# Altium PCB Temp_sense_Project 2.0(right angle.PcbDoc (part 1 of 5)
Units mm, origin at the board's own origin, x right, y up, seen from the top; angles counter-clockwise.
Board outline 238.12 x 109.47 mm, 4 copper layers (Top Layer, Layer 1, Layer 2, Bottom Layer), stack 0.603 mm thick; 185 components, 161 nets, 944 pads, 283 vias.
Unrouted connection lines stored in the file: 2.
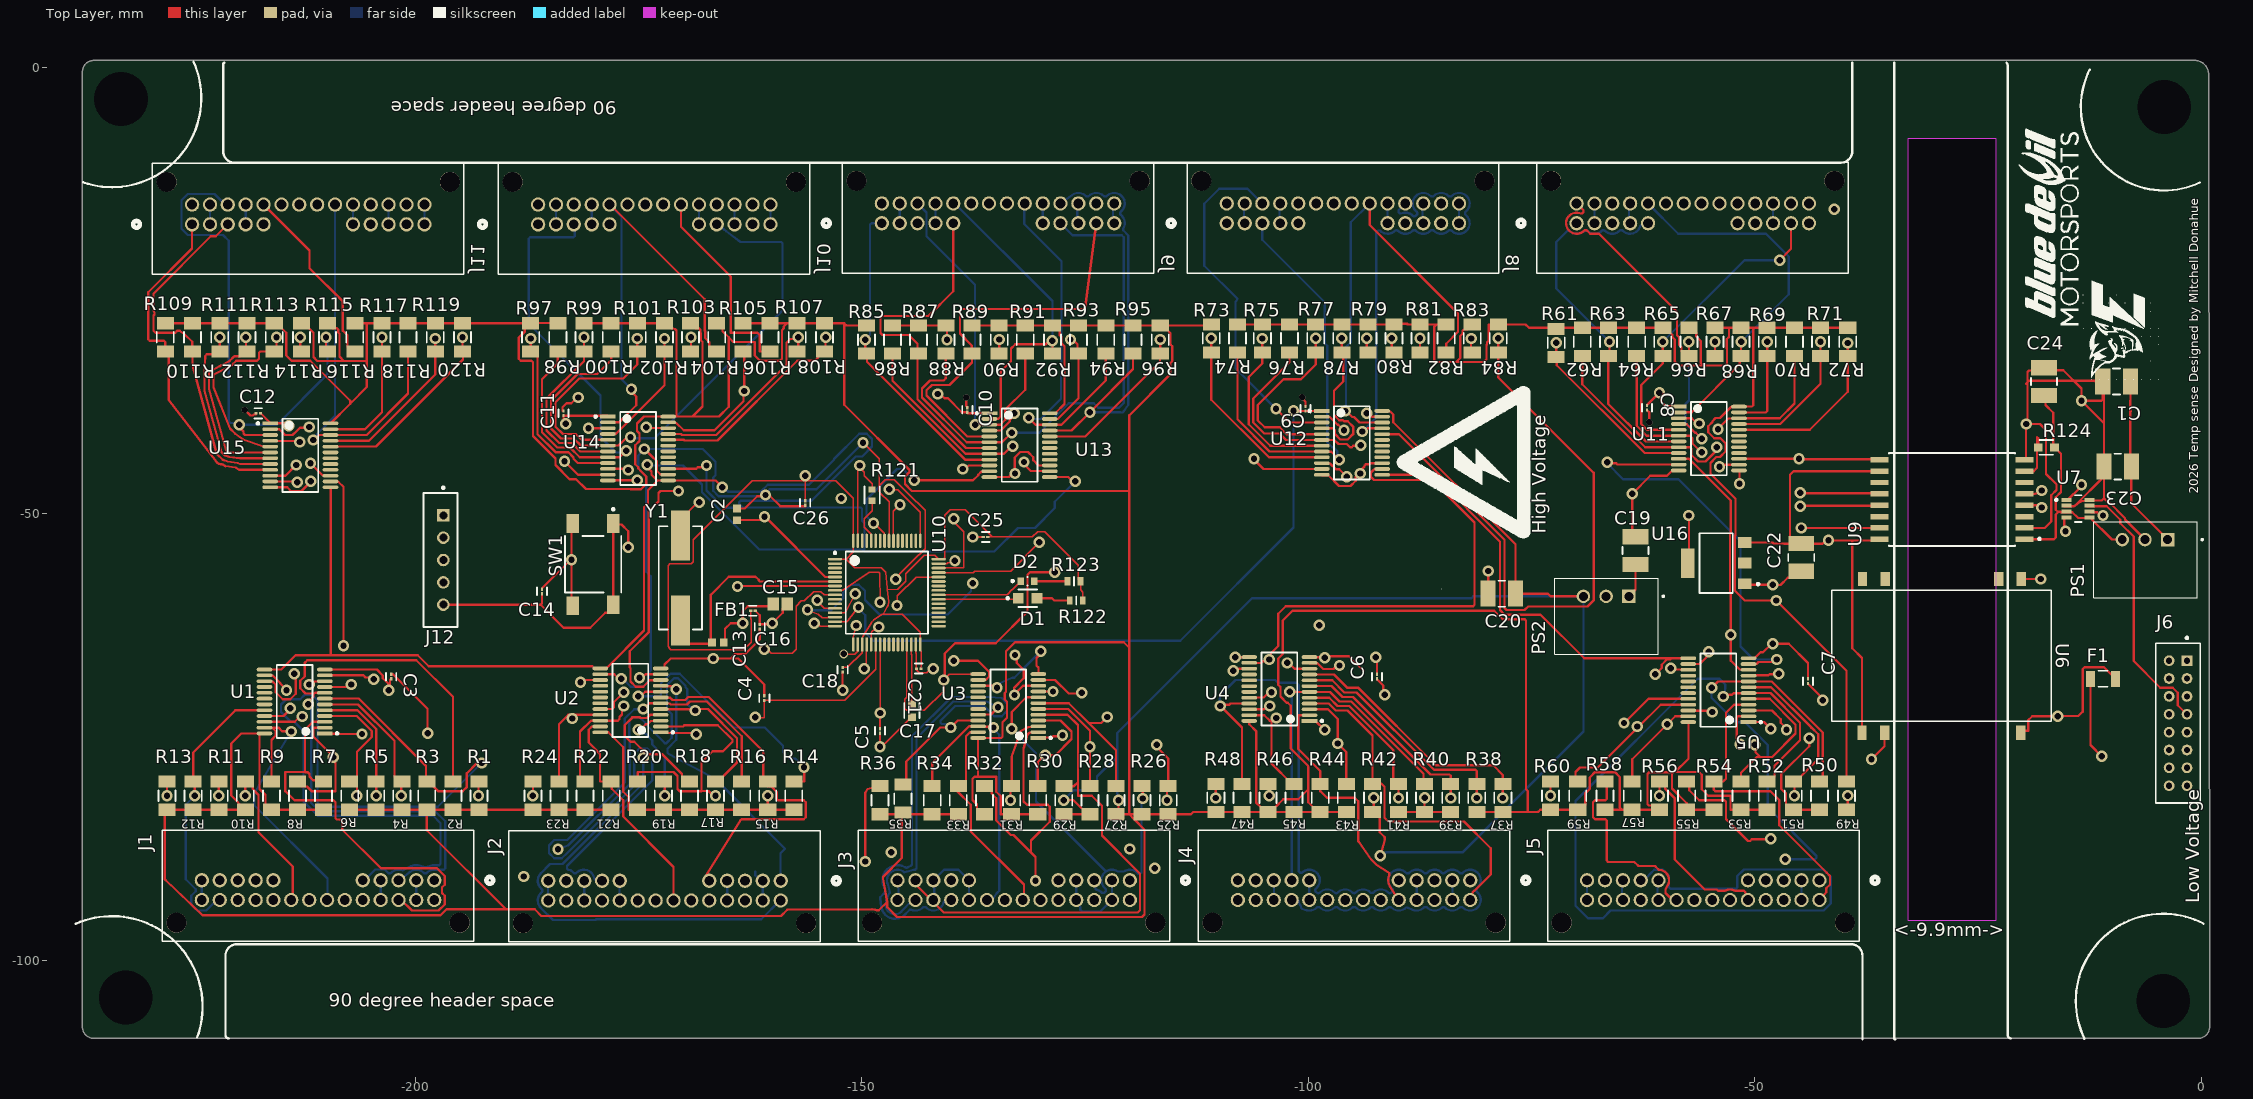
[diagram p0: Top Layer view]
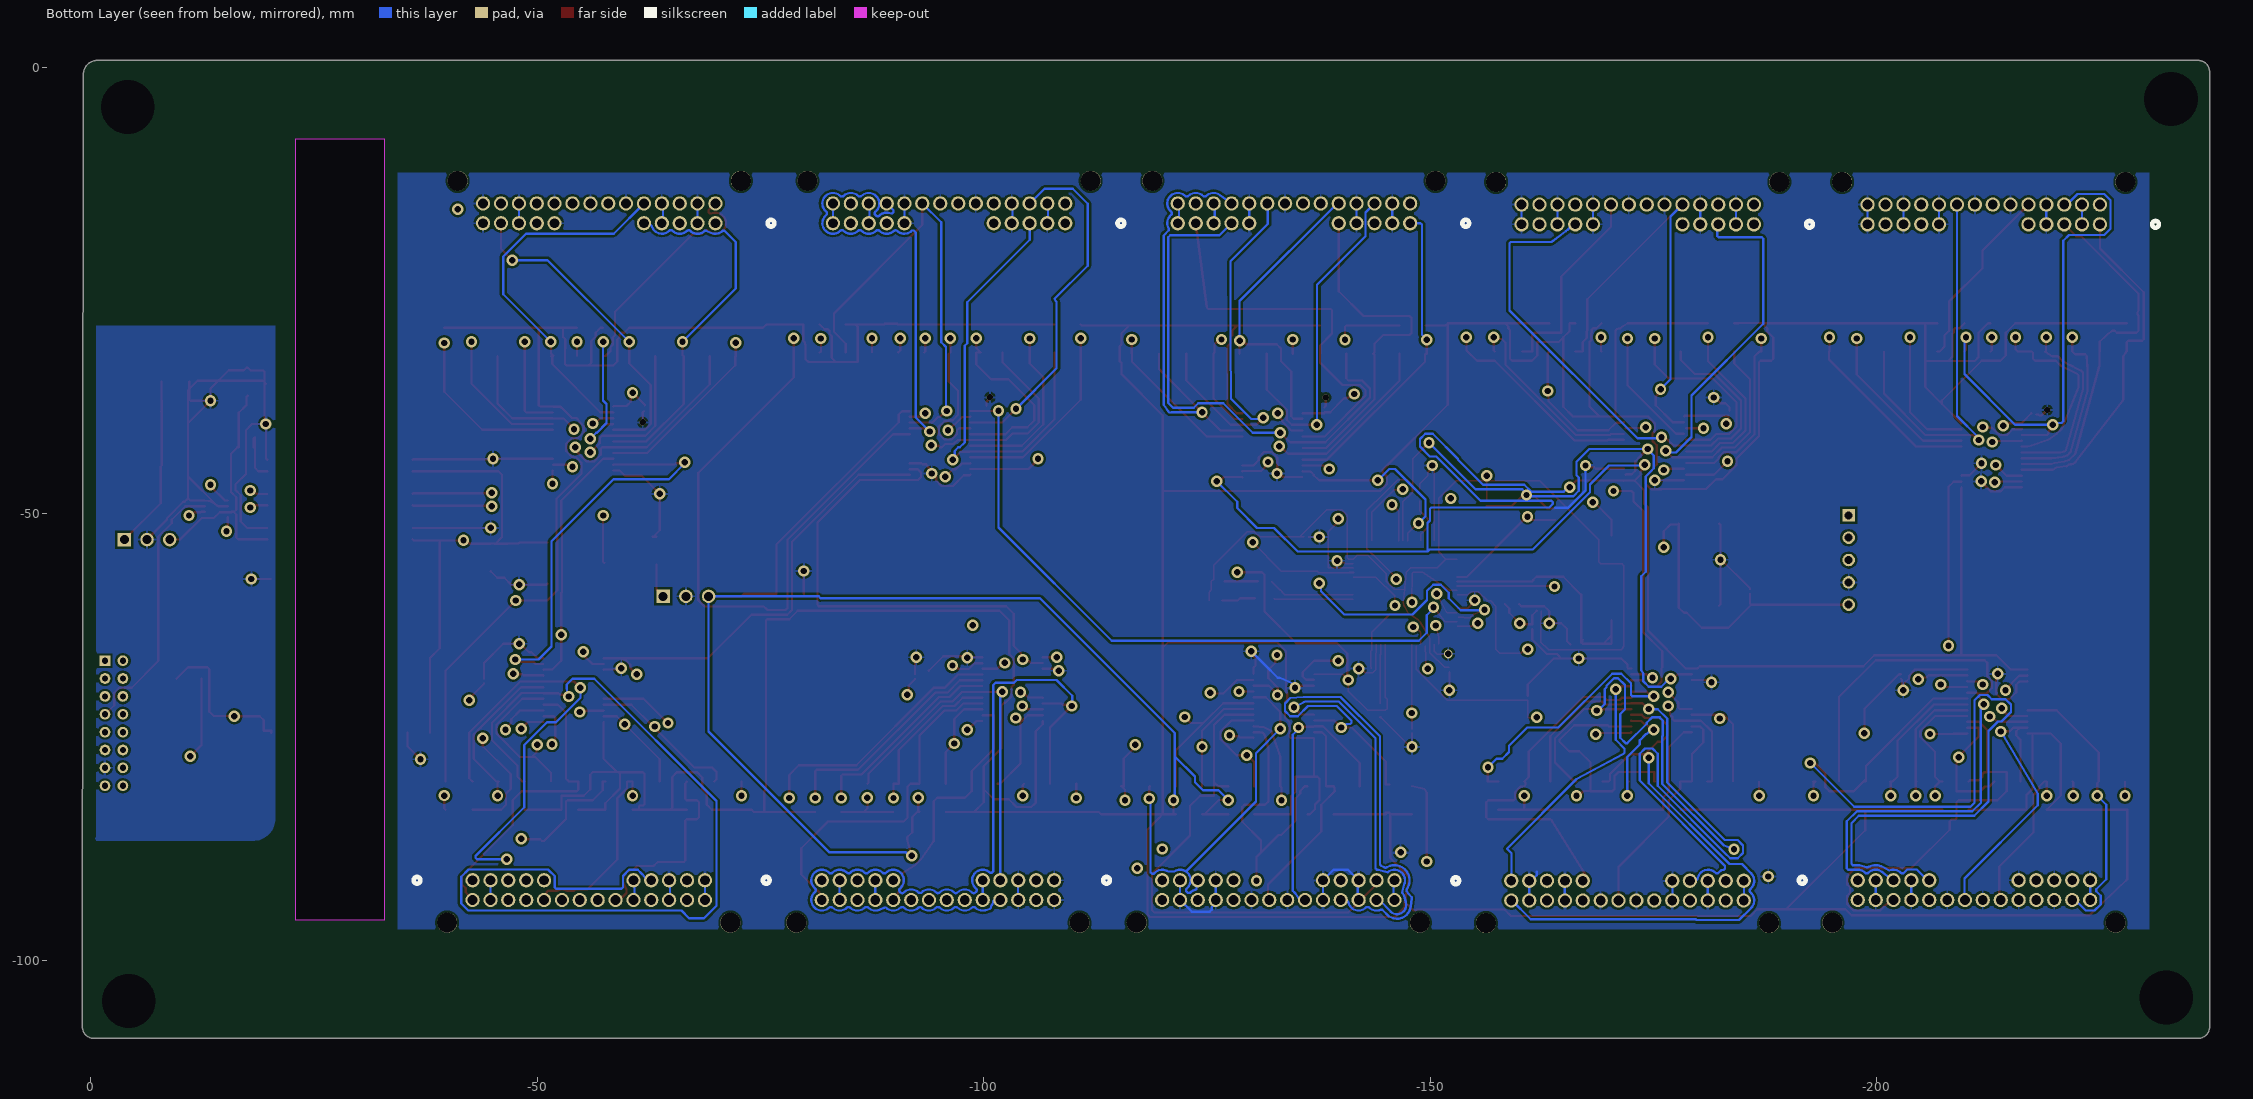
[diagram p1: Bottom Layer view, seen from below]
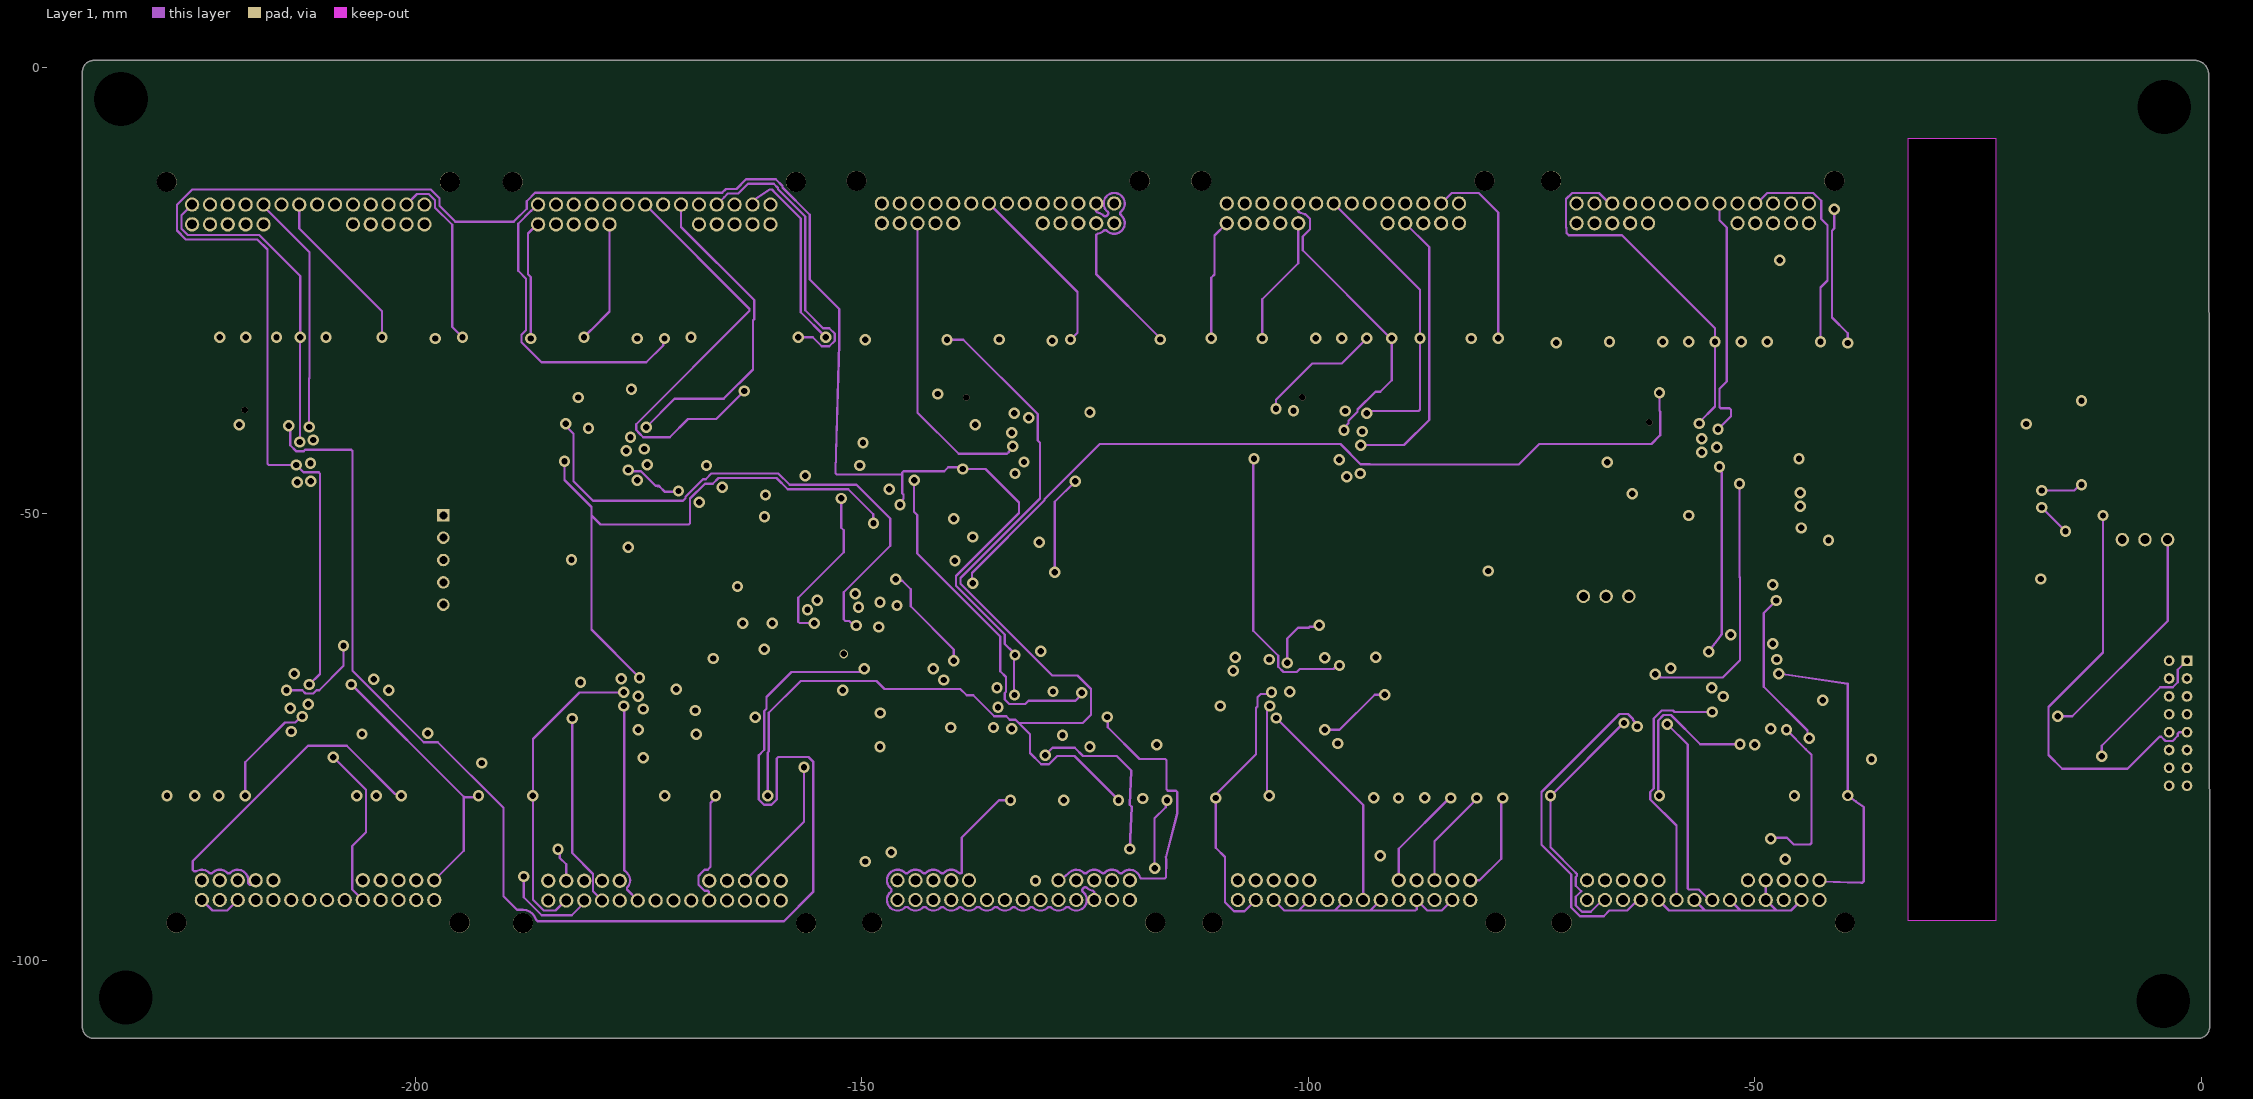
[diagram p2: Layer 1]
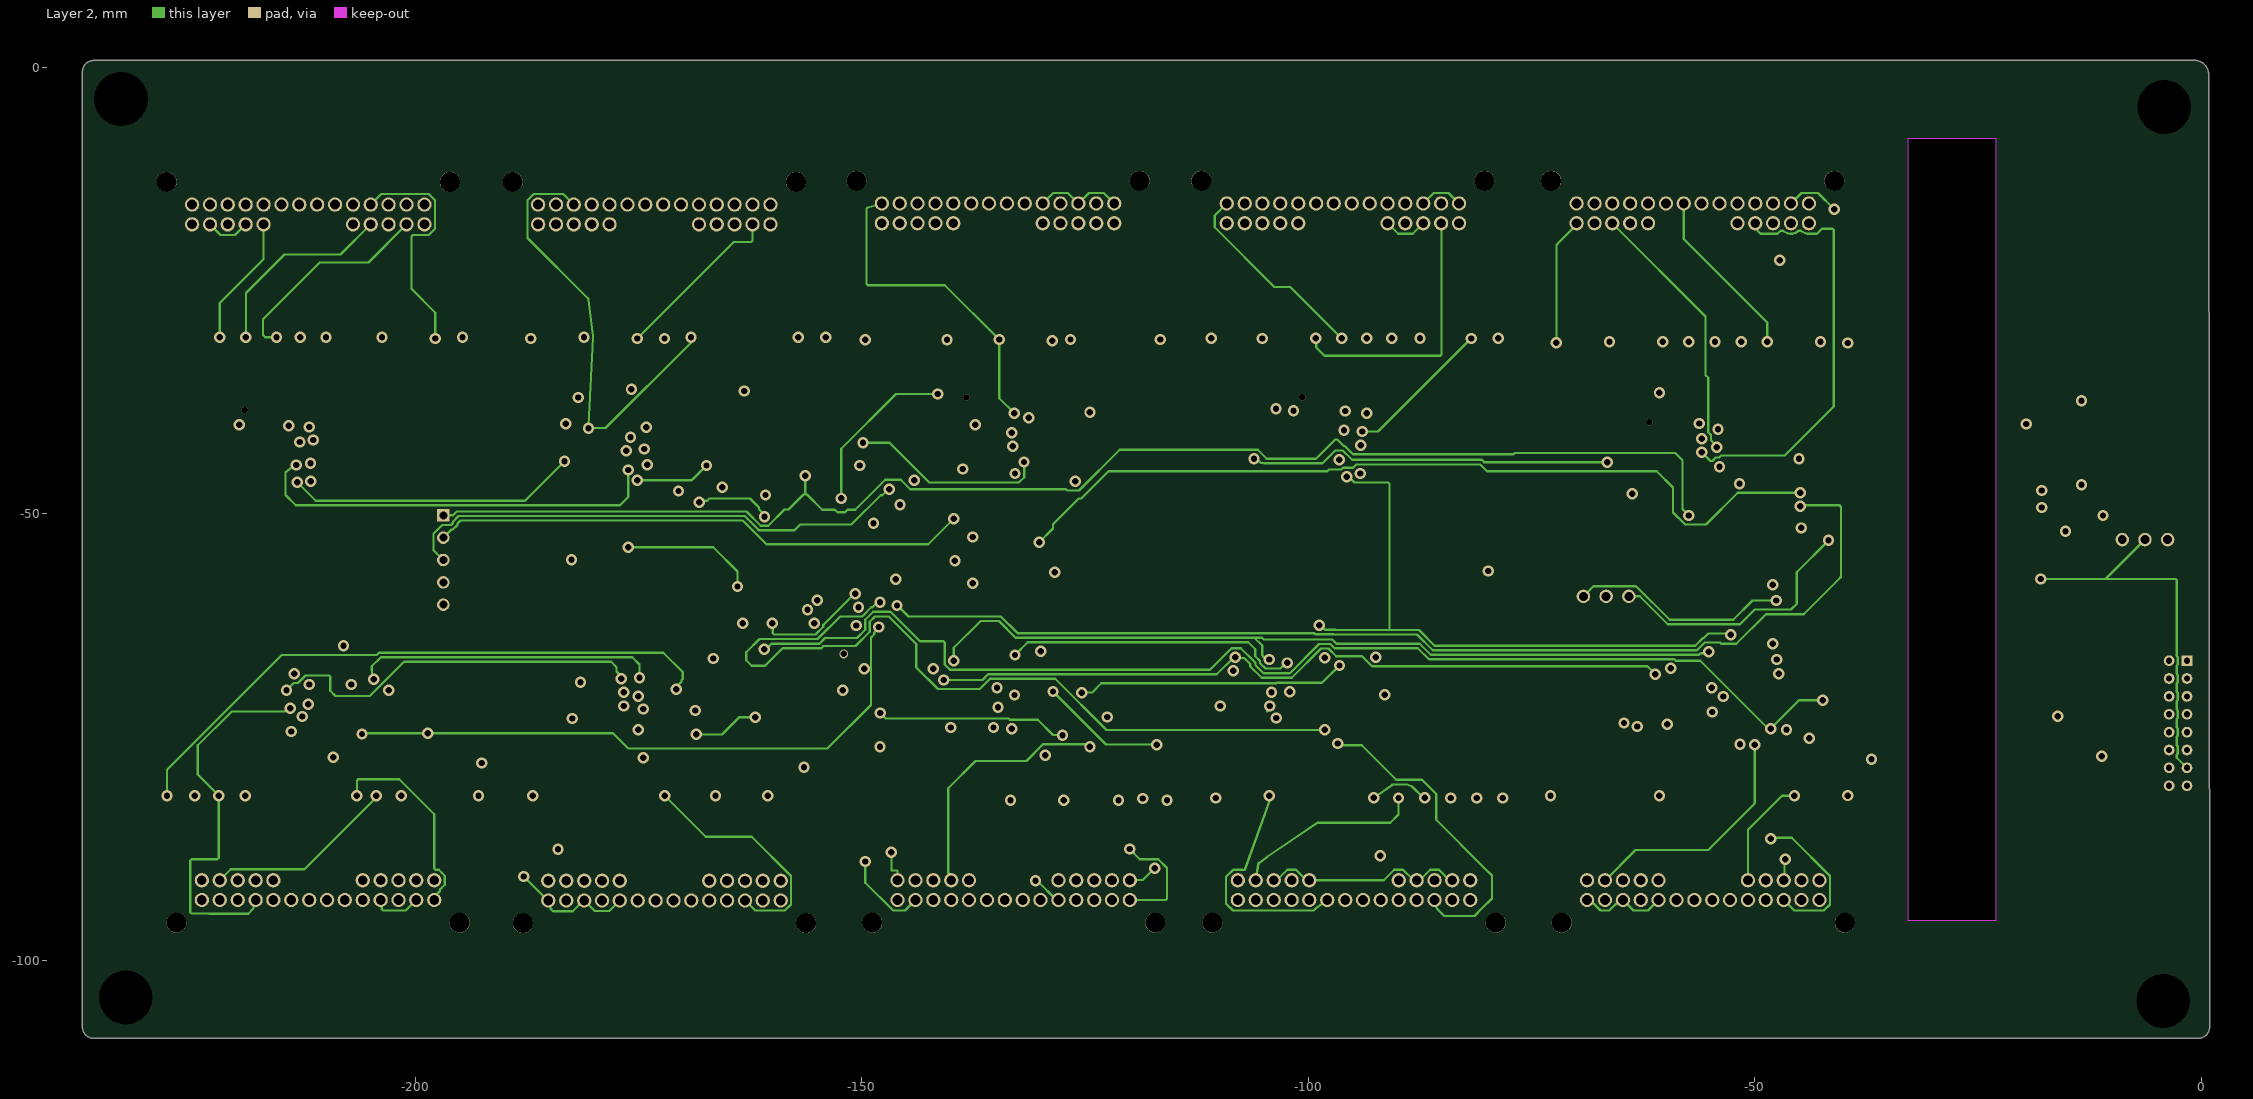
[diagram p3: Layer 2]
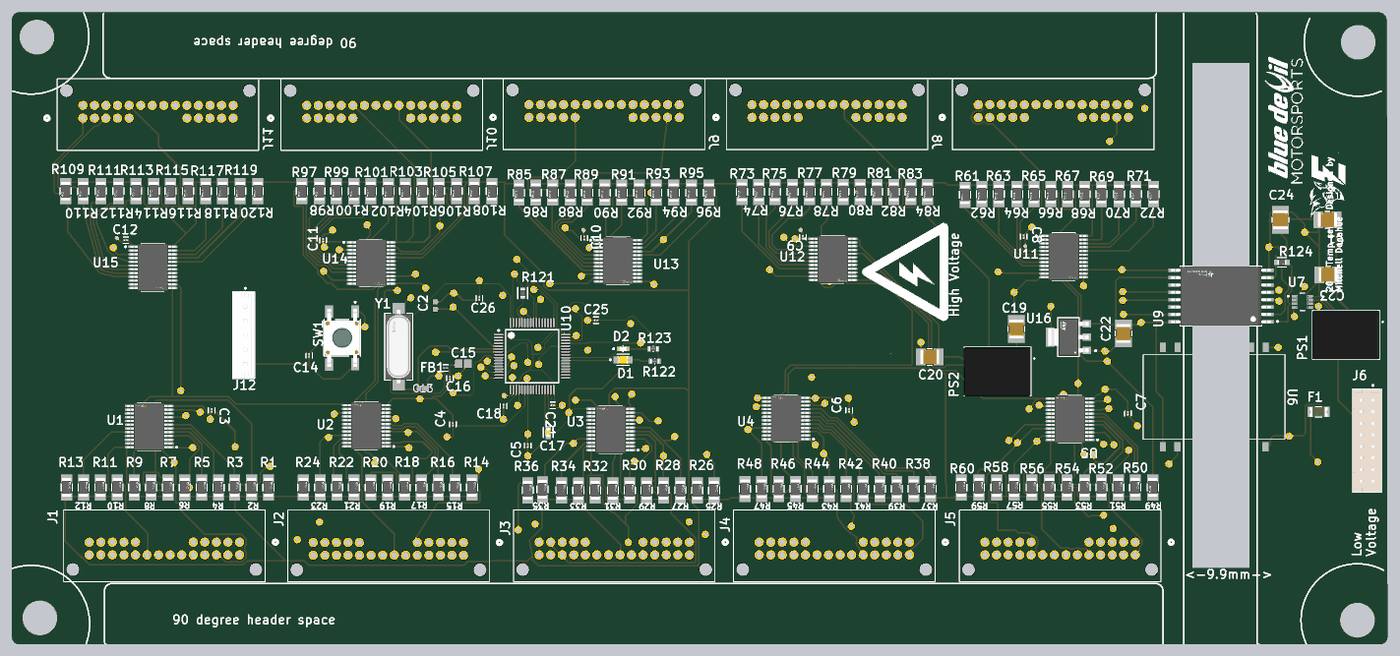
[diagram p7: 3D render of the assembled board from above, using the file's embedded part models]

## Layer stack, top to bottom
Top Solder: solder mask 0.0102, Solder Resist, Dk 3.5
Top Layer: signal copper 0.0356
Dielectric 2: prepreg 0.0711, PP-006, Dk 4.1
Layer 1: signal copper 0.035
Dielectric 1: dielectric 0.32, FR-4, Dk 4.8
Layer 2: signal copper 0.035
Dielectric 3: prepreg 0.0711, PP-006, Dk 4.1
Bottom Layer: signal copper 0.0356
Bottom Solder: solder mask 0.0102, Solder Resist, Dk 3.5

## Board outline
-237.236,-107.442 ccw(c-235.966,-107.442) -235.966,-108.712 -0.381,-108.712 ccw(c-0.381,-107.442) 0.889,-107.442 0.777,-0.773 ccw(c-0.758,-0.773) -0.758,0.762 -235.966,0.762 ccw(c-235.966,-0.508) -237.236,-0.508
cut-out: -32.884,-56.905 -32.884,-95.513 -23.011,-95.513 -23.011,-8.01 -32.884,-8.01 -32.884,-48.65

## Design rules (kind name [scope] priority, off if disabled: settings)
Clearance mcu_clearance [(InComponentClass('MCU') AND InComponent('U10'))] p1: gap=0.15 ignorepadtopadclearanceinfootprint=FALSE
Clearance [All] p2: gap=0.254 ignorepadtopadclearanceinfootprint=FALSE
PolygonConnect [All] p1: connectstyle=Relief reliefconductorwidth=0.254 reliefentries=4 polygonreliefangle="90 Angle" airgapwidth=0.254
RoutingVias [All] p1: holewidth=0.711 width=1.27 viastyle="Through Hole" minholewidth=0.711 minwidth=1.27 maxholewidth=0.711 maxwidth=1.27
SolderMaskExpansion [All] p1: expansion=0.102 istentingtop=FALSE
SupplyNets "Schematic Supply Nets_2" [InNet('LV_GND')] p1: voltage=0.000
SupplyNets "Schematic Supply Nets" [InNet('GND')] p2: voltage=0.000
Width [All] p1: maxlimit=0.254 minlimit=0.254 preferedwidth=0.254
30 further rules are at their usual default settings.

## Classes and differential pairs
component class Power: C7 C12 C22 C24 F1 PS1 R124 U3 U9 U13
component class "Mux side right": C2 C11 C12 C15 C26 J3 J4 J9 R5 R14 R15 R22 R24 R29 R32 R34 R38 R39 R41 R43 R51 R52 R53 R57 R58 R60 R61 R62 R66 R72 R73 R75 R76 R78 R79 R80 R83 R84 R89 R92 R93 R94 R99 R105 R107 R108 R113 R115 R117 R120 R122 U7 U9 U11 U13 U16
component class "mux side left": C2 C11 C13 C14 C16 J3 J4 J5 J9 R1 R3 R4 R5 R6 R9 R13 R14 R15 R19 R20 R22 R23 R24 R29 R32 R34 R38 R43 R49 R51 R52 R53 R57 R58 R60 R61 R62 R71 R78 R79 R80 R84 R89 R94 R99 R102 R105 R107 R108 R112 R113 R117 R120 U1 U2 U4 U10
component class MCU: C2 C7 C11 C12 C14 C15 C16 C19 C26 D1 D2 FB1 J5 PS2 R71 R72 R122 SW1 U11 U16 Y1

## Components (designator, comment, footprint, x,y, rotation, side; value= is the part's Value field where it differs from the comment)
C1 "1210ZC106KAT2A" FP-1210-L_3_3_0_4-W_2_5_0-IPC_A -9.516,-35.188 r180 top
C2 "06035A300JAT2A" CAPC1608X90X35LL15T15 -163.948,-50.047 r90 top
C3 "GRM033R61A104KE15D" FP-GRM033-0_03-IPC_C#1 -202.683,-68.208 r270 top
C4 "GRM033R61A104KE15D" FP-GRM033-0_03-IPC_C#1 -160.9,-70.621 r90 top
C5 "GRM033R61A104KE15D" FP-GRM033-0_03-IPC_C#1 -147.946,-74.304 r270 top
C6 "GRM033R61A104KE15D" FP-GRM033-0_03-IPC_C#1 -92.32,-68.208 r90 top
C7 "GRM033R61A104KE15D" FP-GRM033-0_03-IPC_C#1 -44.06,-68.716 r90 top
C8 "GRM033R61A104KE15D" FP-GRM033-0_03-IPC_C#1 -62.094,-38.109 r270 top
C9 "GRM033R61A104KE15D" FP-GRM033-0_03-IPC_C#1 -100.321,-38.236 r90 top
C10 "GRM033R61A104KE15D" FP-GRM033-0_03-IPC_C#2 -138.167,-38.363 r90 top
C11 "GRM033R61A104KE15D" FP-GRM033-0_03-IPC_C#1 -183.379,-38.744 r90 top
C12 "GRM033R61A104KE15D" FP-GRM033-0_03-IPC_C#1 -217.542,-38.744 r180 top
C13 "06035A300JAT2A" CAPC1608X90X35LL15T15 -166.107,-64.398 r180 top
C14 "GRM033R61A104KE15D" FP-GRM033-0_03-IPC_C#1 -185.792,-58.683 r90 top
C15 "0805YD105MAT2A" CAPC2013X140X50NL20T25 -159.122,-60.08 r0 top
C16 "GRM033R61A104KE15D" FP-GRM033-0_03-IPC_C#1 -161.408,-62.62 r270 top
C17 "CC0603KPX5R7BB225" FP-CC0603-DA-MFG -144.39,-72.018 r270 top value="2.2 uF"
C18 "GRM033R61A104KE15D" FP-GRM033-0_03-IPC_C#1 -152.137,-67.446 r270 top
C19 "1210ZC106KAT2A" FP-1210-L_3_3_0_4-W_2_5_0-IPC_A -63.364,-54.111 r270 top
C20 "1210ZC106KAT2A" FP-1210-L_3_3_0_4-W_2_5_0-IPC_A -78.35,-58.937 r180 top
C21 "RM033R61A104KE15D" FP-GRM033-0_03-IPC_C#1 -143.628,-67.319 r180 top
C22 "1210ZC106KAT2A" FP-1210-L_3_3_0_4-W_2_5_0-IPC_A -44.822,-54.873 r90 top
C23 "1210ZC106KAT2A" FP-1210-L_3_3_0_4-W_2_5_0-IPC_A -9.389,-44.713 r180 top
C24 "1210ZC106KAT2A" FP-1210-L_3_3_0_4-W_2_5_0-IPC_A -17.644,-35.188 r90 top
C25 "GRM033R61A104KE15D" FP-GRM033-0_03-IPC_C#1 -136.135,-52.587 r180 top
C26 "GRM033R61A104KE15D" FP-GRM033-0_03-IPC_C#1 -156.328,-48.777 r270 top
D1 "APHCM2012SYCK-F01" FP-APHCM2012SYCK-F01-MFG -131.436,-59.445 r0 top
D2 "APHD1608LZGCK" FP-APHD1608LZGCK-MFG -131.436,-57.54 r0 top
F1 "1206L075/16WR" FP-1206L-MFG -11.04,-68.462 r0 top value=0.09-0.29Ω
FB1 "BLM03BB750SZ1D" FP-BLM03-0_03-d0_3-IPC_C -162.17,-60.842 r0 top
J1 "348250240" CONN_SD-34825-001_24_MOL -197.857,-91.017 r180 top
J2 "348250240" CONN_SD-34825-001_24_MOL -159.071,-91.068 r180 top
J3 "348250240" CONN_SD-34825-001_24_MOL -119.981,-91.017 r180 top
J4 "348250240" CONN_SD-34825-001_24_MOL -81.881,-91.017 r180 top
J5 "348250240" CONN_SD-34825-001_24_MOL -42.79,-91.017 r180 top
J6 "B16B-PHDSS(LF)(SN)" FP-B16B-PHDSS_LF_SN-MFG -2.642,-73.431 r90 top
J7 "348250240" CONN_SD-34825-001_24_MOL -69.968,-17.459 r0 top
J8 "348250240" CONN_SD-34825-001_24_MOL -109.135,-17.459 r0 top
J9 "348250240" CONN_SD-34825-001_24_MOL -147.743,-17.459 r0 top
J10 "348250240" CONN_SD-34825-001_24_MOL -186.224,-17.586 r0 top
J11 "348250240" CONN_SD-34825-001_24_MOL -224.959,-17.586 r0 top
J12 "B5B-EH-A(LF)(SN)" FP-B5B-EH-A_LF_SN-MFG -197.141,-55.167 r270 top
PS1 "R-78E3.3-0.5" CONV_R-78E3.3-0.5 -6.341,-55.127 r180 top
PS2 "R-78E3.3-0.5" CONV_R-78E3.3-0.5 -66.666,-61.477 r180 top
R1 "RN73R2BTTD3001B25" FP-RN73R2B-IPC_A -192.841,-81.543 r90 top
R2 "RN73R2BTTD3001B25" FP-RN73R2B-IPC_A -195.762,-81.543 r90 top
R3 "RN73R2BTTD3001B25" FP-RN73R2B-IPC_A -198.683,-81.543 r90 top
R4 "RN73R2BTTD3001B25" FP-RN73R2B-IPC_A -201.477,-81.543 r90 top
R5 "RN73R2BTTD3001B25" FP-RN73R2B-IPC_A -204.398,-81.543 r90 top
R6 "RN73R2BTTD3001B25" FP-RN73R2B-IPC_A -207.319,-81.543 r90 top
R7 "RN73R2BTTD3001B25" FP-RN73R2B-IPC_A -210.24,-81.543 r90 top
R8 "RN73R2BTTD3001B25" FP-RN73R2B-IPC_A -213.161,-81.543 r90 top
R9 "RN73R2BTTD3001B25" FP-RN73R2B-IPC_A -216.082,-81.543 r90 top
R10 "RN73R2BTTD3001B25" FP-RN73R2B-IPC_A -219.003,-81.543 r90 top
R11 "RN73R2BTTD3001B25" FP-RN73R2B-IPC_A -221.924,-81.543 r90 top
R12 "RN73R2BTTD3001B25" FP-RN73R2B-IPC_A -224.845,-81.543 r90 top
R13 "RN73R2BTTD3001B25" FP-RN73R2B-IPC_A -227.766,-81.543 r90 top
R14 "RN73R2BTTD3001B25" FP-RN73R2B-IPC_A -157.598,-81.543 r90 top
R15 "RN73R2BTTD3001B25" FP-RN73R2B-IPC_A -160.519,-81.543 r90 top
R16 "RN73R2BTTD3001B25" FP-RN73R2B-IPC_A -163.44,-81.543 r90 top
R17 "RN73R2BTTD3001B25" FP-RN73R2B-IPC_A -166.361,-81.543 r90 top
R18 "RN73R2BTTD3001B25" FP-RN73R2B-IPC_A -169.282,-81.543 r90 top
R19 "RN73R2BTTD3001B25" FP-RN73R2B-IPC_A -172.203,-81.543 r90 top
R20 "RN73R2BTTD3001B25" FP-RN73R2B-IPC_A -175.124,-81.543 r90 top
R21 "RN73R2BTTD3001B25" FP-RN73R2B-IPC_A -178.045,-81.543 r90 top
R22 "RN73R2BTTD3001B25" FP-RN73R2B-IPC_A -180.966,-81.543 r90 top
R23 "RN73R2BTTD3001B25" FP-RN73R2B-IPC_A -183.887,-81.543 r90 top
R24 "RN73R2BTTD3001B25" FP-RN73R2B-IPC_A -186.808,-81.543 r90 top
R25 "RN73R2BTTD3001B25" FP-RN73R2B-IPC_A -115.688,-82.051 r90 top
R26 "RN73R2BTTD3001B25" FP-RN73R2B-IPC_A -118.609,-82.051 r90 top
R27 "RN73R2BTTD3001B25" FP-RN73R2B-IPC_A -121.53,-82.051 r90 top
R28 "RN73R2BTTD3001B25" FP-RN73R2B-IPC_A -124.451,-82.051 r90 top
R29 "RN73R2BTTD3001B25" FP-RN73R2B-IPC_A -127.372,-82.051 r90 top
R30 "RN73R2BTTD3001B25" FP-RN73R2B-IPC_A -130.293,-82.051 r90 top
R31 "RN73R2BTTD3001B25" FP-RN73R2B-IPC_A -133.214,-82.051 r90 top
R32 "RN73R2BTTD3001B25" FP-RN73R2B-IPC_A -136.262,-82.051 r90 top
R33 "RN73R2BTTD3001B25" FP-RN73R2B-IPC_A -139.183,-82.051 r90 top
R34 "RN73R2BTTD3001B25" FP-RN73R2B-IPC_A -142.104,-82.051 r90 top
R35 "RN73R2BTTD3001B25" FP-RN73R2B-IPC_A -145.393,-81.873 r90 top
R36 "RN73R2BTTD3001B25" FP-RN73R2B-IPC_A -147.946,-82.051 r90 top
R37 "RN73R2BTTD3001B25" FP-RN73R2B-IPC_A -78.223,-81.797 r90 top
R38 "RN73R2BTTD3001B25" FP-RN73R2B-IPC_A -81.144,-81.797 r90 top
R39 "RN73R2BTTD3001B25" FP-RN73R2B-IPC_A -84.065,-81.797 r90 top
R40 "RN73R2BTTD3001B25" FP-RN73R2B-IPC_A -86.986,-81.797 r90 top
R41 "RN73R2BTTD3001B25" FP-RN73R2B-IPC_A -89.907,-81.797 r90 top
R42 "RN73R2BTTD3001B25" FP-RN73R2B-IPC_A -92.828,-81.797 r90 top
R43 "RN73R2BTTD3001B25" FP-RN73R2B-IPC_A -95.749,-81.797 r90 top
R44 "RN73R2BTTD3001B25" FP-RN73R2B-IPC_A -98.67,-81.797 r90 top
R45 "RN73R2BTTD3001B25" FP-RN73R2B-IPC_A -101.591,-81.797 r90 top
R46 "RN73R2BTTD3001B25" FP-RN73R2B-IPC_A -104.512,-81.797 r90 top
R47 "RN73R2BTTD3001B25" FP-RN73R2B-IPC_A -107.433,-81.797 r90 top
R48 "RN73R2BTTD3001B25" FP-RN73R2B-IPC_A -110.354,-81.797 r90 top
R49 "RN73R2BTTD3001B25" FP-RN73R2B-IPC_A -39.742,-81.543 r270 top
R50 "RN73R2BTTD3001B25" FP-RN73R2B-IPC_A -42.79,-81.543 r90 top
R51 "RN73R2BTTD3001B25" FP-RN73R2B-IPC_A -45.711,-81.543 r90 top
R52 "RN73R2BTTD3001B25" FP-RN73R2B-IPC_A -48.632,-81.543 r90 top
R53 "RN73R2BTTD3001B25" FP-RN73R2B-IPC_A -51.553,-81.543 r90 top
R54 "RN73R2BTTD3001B25" FP-RN73R2B-IPC_A -54.601,-81.543 r90 top
R55 "RN73R2BTTD3001B25" FP-RN73R2B-IPC_A -57.649,-81.543 r90 top
R56 "RN73R2BTTD3001B25" FP-RN73R2B-IPC_A -60.697,-81.543 r90 top
R57 "RN73R2BTTD3001B25" FP-RN73R2B-IPC_A -63.745,-81.543 r90 top
R58 "RN73R2BTTD3001B25" FP-RN73R2B-IPC_A -66.793,-81.543 r90 top
R59 "RN73R2BTTD3001B25" FP-RN73R2B-IPC_A -69.841,-81.543 r90 top
R60 "RN73R2BTTD3001B25" FP-RN73R2B-IPC_A -72.889,-81.543 r90 top
R61 "RN73R2BTTD3001B25" FP-RN73R2B-IPC_A -72.254,-30.861 r270 top
R62 "RN73R2BTTD3001B25" FP-RN73R2B-IPC_A -69.333,-30.743 r270 top
R63 "RN73R2BTTD3001B25" FP-RN73R2B-IPC_A -66.412,-30.743 r270 top
R64 "RN73R2BTTD3001B25" FP-RN73R2B-IPC_A -63.237,-30.743 r270 top
R65 "RN73R2BTTD3001B25" FP-RN73R2B-IPC_A -60.316,-30.743 r270 top
R66 "RN73R2BTTD3001B25" FP-RN73R2B-IPC_A -57.395,-30.743 r270 top
R67 "RN73R2BTTD3001B25" FP-RN73R2B-IPC_A -54.474,-30.743 r270 top
R68 "RN73R2BTTD3001B25" FP-RN73R2B-IPC_A -51.553,-30.743 r270 top
R69 "RN73R2BTTD3001B25" FP-RN73R2B-IPC_A -48.632,-30.743 r270 top
R70 "RN73R2BTTD3001B25" FP-RN73R2B-IPC_A -45.584,-30.743 r270 top
R71 "RN73R2BTTD3001B25" FP-RN73R2B-IPC_A -42.663,-30.743 r270 top
R72 "RN73R2BTTD3001B25" FP-RN73R2B-IPC_A -39.615,-30.743 r270 top
R73 "RN73R2BTTD3001B25" FP-RN73R2B-IPC_A -110.862,-30.362 r270 top
R74 "RN73R2BTTD3001B25" FP-RN73R2B-IPC_A -107.941,-30.362 r270 top
R75 "RN73R2BTTD3001B25" FP-RN73R2B-IPC_A -105.147,-30.362 r270 top
R76 "RN73R2BTTD3001B25" FP-RN73R2B-IPC_A -102.099,-30.362 r270 top
R77 "RN73R2BTTD3001B25" FP-RN73R2B-IPC_A -99.178,-30.362 r270 top
R78 "RN73R2BTTD3001B25" FP-RN73R2B-IPC_A -96.257,-30.362 r270 top
R79 "RN73R2BTTD3001B25" FP-RN73R2B-IPC_A -93.336,-30.362 r270 top
R80 "RN73R2BTTD3001B25" FP-RN73R2B-IPC_A -90.415,-30.362 r270 top
R81 "RN73R2BTTD3001B25" FP-RN73R2B-IPC_A -87.494,-30.362 r270 top
R82 "RN73R2BTTD3001B25" FP-RN73R2B-IPC_A -84.573,-30.362 r270 top
R83 "RN73R2BTTD3001B25" FP-RN73R2B-IPC_A -81.652,-30.362 r270 top
R84 "RN73R2BTTD3001B25" FP-RN73R2B-IPC_A -78.731,-30.362 r270 top
R85 "RN73R2BTTD3001B25" FP-RN73R2B-IPC_A -149.47,-30.489 r270 top
R86 "RN73R2BTTD3001B25" FP-RN73R2B-IPC_A -146.549,-30.489 r270 top
R87 "RN73R2BTTD3001B25" FP-RN73R2B-IPC_A -143.628,-30.489 r270 top
R88 "RN73R2BTTD3001B25" FP-RN73R2B-IPC_A -140.58,-30.489 r270 top
R89 "RN73R2BTTD3001B25" FP-RN73R2B-IPC_A -137.659,-30.489 r270 top
R90 "RN73R2BTTD3001B25" FP-RN73R2B-IPC_A -134.611,-30.489 r270 top
R91 "RN73R2BTTD3001B25" FP-RN73R2B-IPC_A -131.69,-30.489 r270 top
R92 "RN73R2BTTD3001B25" FP-RN73R2B-IPC_A -128.642,-30.489 r270 top
R93 "RN73R2BTTD3001B25" FP-RN73R2B-IPC_A -125.721,-30.489 r270 top
R94 "RN73R2BTTD3001B25" FP-RN73R2B-IPC_A -122.673,-30.489 r270 top
R95 "RN73R2BTTD3001B25" FP-RN73R2B-IPC_A -119.625,-30.489 r270 top
R96 "RN73R2BTTD3001B25" FP-RN73R2B-IPC_A -116.577,-30.489 r270 top
R97 "RN73R2BTTD3001B25" FP-RN73R2B-IPC_A -187.062,-30.235 r270 top
R98 "RN73R2BTTD3001B25" FP-RN73R2B-IPC_A -184.014,-30.235 r270 top
R99 "RN73R2BTTD3001B25" FP-RN73R2B-IPC_A -181.093,-30.235 r270 top
R100 "RN73R2BTTD3001B25" FP-RN73R2B-IPC_A -178.045,-30.235 r270 top
R101 "RN73R2BTTD3001B25" FP-RN73R2B-IPC_A -175.124,-30.235 r270 top
R102 "RN73R2BTTD3001B25" FP-RN73R2B-IPC_A -172.076,-30.235 r270 top
R103 "RN73R2BTTD3001B25" FP-RN73R2B-IPC_A -169.155,-30.235 r270 top
R104 "RN73R2BTTD3001B25" FP-RN73R2B-IPC_A -166.234,-30.235 r270 top
R105 "RN73R2BTTD3001B25" FP-RN73R2B-IPC_A -163.313,-30.235 r270 top
R106 "RN73R2BTTD3001B25" FP-RN73R2B-IPC_A -160.265,-30.235 r270 top
R107 "RN73R2BTTD3001B25" FP-RN73R2B-IPC_A -157.217,-30.235 r270 top
R108 "RN73R2BTTD3001B25" FP-RN73R2B-IPC_A -154.169,-30.235 r270 top
R109 "RN73R2BTTD3001B25" FP-RN73R2B-IPC_A -227.956,-30.235 r270 top
R110 "RN73R2BTTD3001B25" FP-RN73R2B-IPC_A -224.908,-30.235 r270 top
R111 "RN73R2BTTD3001B25" FP-RN73R2B-IPC_A -221.86,-30.235 r270 top
R112 "RN73R2BTTD3001B25" FP-RN73R2B-IPC_A -218.812,-30.235 r270 top
R113 "RN73R2BTTD3001B25" FP-RN73R2B-IPC_A -215.764,-30.235 r270 top
R114 "RN73R2BTTD3001B25" FP-RN73R2B-IPC_A -212.716,-30.235 r270 top
R115 "RN73R2BTTD3001B25" FP-RN73R2B-IPC_A -209.795,-30.235 r270 top
R116 "RN73R2BTTD3001B25" FP-RN73R2B-IPC_A -206.747,-30.235 r270 top
R117 "RN73R2BTTD3001B25" FP-RN73R2B-IPC_A -203.699,-30.235 r270 top
R118 "RN73R2BTTD3001B25" FP-RN73R2B-IPC_A -200.778,-30.235 r270 top
R119 "RN73R2BTTD3001B25" FP-RN73R2B-IPC_A -197.73,-30.235 r270 top
R120 "RN73R2BTTD3001B25" FP-RN73R2B-IPC_A -194.682,-30.235 r270 top
R121 "RQ73C1J100KBTD" FP-RQ731J-IPC_C -148.835,-47.888 r270 top value=100KΩ
R122 "ERJH3GJ331V" FP-ERJH3G-MFG -125.975,-59.699 r180 top
R123 "ERJH3GJ331V" FP-ERJH3G-MFG -126.229,-57.54 r180 top
R124 "RN73C1J10KB" FP-RN731J-MFG -17.39,-42.554 r0 top value=10KΩ
SW1 "2-1977223-2" FP-2-1977223-2-MFG -180.077,-55.635 r0 top
U1 "CD74HC4067SM96" FP-DB0024A-IPC_C -213.478,-71.002 r180 top
U2 "CD74HC4067SM96" FP-DB0024A-IPC_C -175.886,-70.875 r180 top
U3 "CD74HC4067SM96" FP-DB0024A-IPC_C -133.595,-71.51 r180 top
U4 "CD74HC4067SM96" FP-DB0024A-IPC_C -103.242,-69.605 r180 top
U5 "CD74HC4067SM96" FP-DB0024A-IPC_C -54.093,-69.732 r180 top
U6 "TIM 3.5-0911SM" "TIM 3.5SM SINGLE_TRP" -29.138,-65.897 r270 top
U7 "TCAN330GDCNR" FP-DCN0008A-MFG -13.834,-49.412 r0 top
U9 "ISO7842FDWW" FP-DWW0016A-MFG -27.934,-48.396 r180 top
U10 "STM32F446RET6" STM-LQFP64_L -147.19,-58.816 r0 top
U11 "CD74HC4067SM96" FP-DB0024A-IPC_C -55.163,-41.564 r0 top
U12 "CD74HC4067SM96" FP-DB0024A-IPC_C -95.114,-42.046 r0 top
U13 "CD74HC4067SM96" FP-DB0024A-IPC_C -132.325,-42.3 r0 top
U14 "CD74HC4067SM96" FP-DB0024A-IPC_C -175.037,-42.681 r0 top
U15 "CD74HC4067SM96" FP-DB0024A-IPC_C -212.843,-43.443 r0 top
U16 "LD1117S33CTR" FP-SOT-223-0046067_14-MFG -54.347,-55.508 r180 top
Y1 "2" FP-ABLS-MFG -170.298,-57.159 r90 top

## Footprints (in the part's own frame and the unit in brackets; to place one, negate y for a bottom-side part, rotate by r counter-clockwise, add the part's x,y. Pads: shape width x height; smd on the part's side, far side on the other; paste and mask are expansions set on the pad)
CAPC1608X90X35LL15T15 [mm] "Chip Capacitor, 2-Leads, Body 1.60x0.81mm, IPC High Density"
  rect 0.85x0.9 smd: 1(-0.65,0) 2(0.65,0)
  body extent -0.88,-0.48 0.87,0.48, height 0.9
CAPC2013X140X50NL20T25 [mm] "Chip Capacitor, 2-Leads, Body 2.00x1.25mm, IPC Medium Density"
  rect 1.3x1.45 smd: 1(-0.8,0) 2(0.8,0)
  body extent -1.1,-0.72 1.1,0.72, height 1.4
CONN_SD-34825-001_24_MOL [mil]
  round 63 hole 43: 1(0,0) 2(79,0) 3(157,0) 4(236,0) 5(315,0) 6(709,0) 7(787,0) 8(866,0) 9(945,0) 10(1024,0) 11(0,87) 12(79,87) 13(157,87) 14(236,87) 15(315,87) 16(394,87) 17(472,87) 18(551,87) 19(630,87) 20(709,87) 21(787,87) 22(866,87) 23(945,87) 24(1024,87)
  round 88 hole 88 unplated: ""(-112,187) ""(1136,187)
  silkscreen extent -260,-220 1198,269
CONV_R-78E3.3-0.5 [mm]
  rect 1.508x1.508 / inner round 1.508 / far side rect 1.508x1.508 hole 1: 1(-2.54,-2.25)
  round 1.508 hole 1: 2(0,-2.25) 3(2.54,-2.25)
  silkscreen extent -6.5,-4.25 5.75,4.25, body extent -5.8,-4.26 5.8,4.25, height 9.9
FP-2-1977223-2-MFG [mm]
  rect 1.4x2.1 smd paste+0 mask+0: 1(2.25,4.55) 2(2.25,-4.55) 3(-2.25,4.55) 4(-2.25,-4.65)
  silkscreen extent -3.15,-3.15 3.15,6.27, body extent -3.25,-5.8 3.25,5.7, height 0.25
FP-1206L-MFG [mm]
  rect 1x1.8 smd paste+0 mask+0: 1(-1.4,0) 2(1.4,0)
  silkscreen extent -0.53,-0.9 0.53,0.9, body extent -2,-1 2,1, height 0.25
FP-1210-L_3_3_0_4-W_2_5_0-IPC_A [mm]
  rect 1.703x2.904 smd paste+0 mask+0: 1(-1.55,0) 2(1.55,0)
  silkscreen extent -0.4,-1.45 0.4,1.45, body extent -2.9,-1.95 2.9,1.95, height 0.25
FP-ABLS-MFG [mm]
  rect 5.6x2.1 smd paste+0 mask+0: 1(-4.75,0) 2(4.75,0)
  silkscreen extent -5.77,-2.42 5.77,2.42, body extent -7.65,-2.52 7.65,2.52, height 0.25
FP-APHCM2012SYCK-F01-MFG [mm]
  rect 1.2x1.2 smd paste+0 mask+0: 1(-1.05,0) 2(1.05,0)
  silkscreen extent -2.35,-0.98 1.05,0.98, body extent -1.75,-0.77 1.75,0.77, height 0.25
FP-APHD1608LZGCK-MFG [mm]
  rect 0.7x0.8 smd paste+0 mask+0: 1(-0.75,0) 2(0.75,0)
  silkscreen extent -1.8,-0.47 0.02,0.47, body extent -1.2,-0.58 1.2,0.58, height 0.25
FP-B5B-EH-A_LF_SN-MFG [mm]
  rect 1.4x1.4 hole 0.9 paste-2539.97 mask+0: 1(-5,0.3)
  round 1.4 hole 0.9 paste-2539.97 mask+0: 2(-2.5,0.3) 3(0,0.3) 4(2.5,0.3) 5(5,0.3)
  silkscreen extent -8.22,-1.9 7.5,1.9, body extent -7.6,-2 7.6,2, height 0.25
FP-B16B-PHDSS_LF_SN-MFG [mm]
  rect 1.2x1.2 hole 0.7 paste-2539.97 mask+0: 1(7,-1)
  round 1.2 hole 0.7 paste-2539.97 mask+0: 2(7,1) 3(5,-1) 4(5,1) 5(3,-1) 6(3,1) 7(1,-1) 8(1,1) 9(-1,-1) 10(-1,1) 11(-3,-1) 12(-3,1) 13(-5,-1) 14(-5,1) 15(-7,-1) 16(-7,1)
  silkscreen extent -8.95,-2.5 9.67,2.5, body extent -9.05,-2.6 9.05,2.6, height 0.25
FP-BLM03-0_03-d0_3-IPC_C [mm]
  rect 0.354x0.263 smd paste+0 mask+0: 1(-0.254,0) 2(0.254,0)
  silkscreen extent -0.43,-0.56 0.43,0.56
FP-CC0603-DA-MFG [mm]
  rect 0.8x0.9 smd paste+0 mask+0: 1(-0.75,0) 2(0.75,0)
  silkscreen extent -0.85,-0.85 0.85,0.85, body extent -1.35,-0.75 1.35,0.75, height 0.25
FP-DB0024A-IPC_C [mm]
  rect 1.753x0.415 smd paste+0 mask+0: 1(-3.375,3.575)
  rrect100% 1.753x0.415 smd paste+0 mask+0: 2(-3.375,2.925) 3(-3.375,2.275) 4(-3.375,1.625) 5(-3.375,0.975) 6(-3.375,0.325) 7(-3.375,-0.325) 8(-3.375,-0.975) 9(-3.375,-1.625) 10(-3.375,-2.275) 11(-3.375,-2.925) 12(-3.375,-3.575) 13(3.375,-3.575) 14(3.375,-2.925) 15(3.375,-2.275) 16(3.375,-1.625) 17(3.375,-0.975) 18(3.375,-0.325) 19(3.375,0.325) 20(3.375,0.975) 21(3.375,1.625) 22(3.375,2.275) 23(3.375,2.925) 24(3.375,3.575)
  silkscreen extent -4.88,-4.1 2,4.1, body extent -4.35,-4.2 4.35,4.2, height 0.25
FP-DCN0008A-MFG [mm]
  rect 1.1x0.45 smd paste+0 mask+0: 1(-1.3,0.975) 2(-1.3,0.325) 3(-1.3,-0.325) 4(-1.3,-0.975) 5(1.3,-0.975) 6(1.3,-0.325) 7(1.3,0.325) 8(1.3,0.975)
  silkscreen extent -2.55,-1.5 0.38,1.5, body extent -1.95,-1.85 1.95,1.85, height 0.25
FP-DWW0016A-MFG [mm]
  rect 2x0.6 smd paste+0 mask+0: 1(-8.125,4.445) 2(-8.125,3.175) 3(-8.125,1.905) 4(-8.125,0.635) 5(-8.125,-0.635) 6(-8.125,-1.905) 7(-8.125,-3.175) 8(-8.125,-4.445) 9(8.125,-4.445) 10(8.125,-3.175) 11(8.125,-1.905) 12(8.125,-0.635) 13(8.125,0.635) 14(8.125,1.905) 15(8.125,3.175) 16(8.125,4.445)
  silkscreen extent -9.9,-5.2 7.05,5.2, body extent -9.23,-5.45 9.23,5.45, height 0.25
FP-ERJH3G-MFG [mm]
  rect 0.65x0.9 smd paste+0 mask+0: 1(-0.725,0) 2(0.725,0)
  silkscreen extent 0,-0.47 0,0.47, body extent -1.15,-0.58 1.15,0.58, height 0.25
FP-GRM033-0_03-IPC_C#1 [mm]
  rect 0.354x0.263 smd paste+0 mask+0: 1(-0.254,0) 2(0.254,0)
  silkscreen extent -0.43,-0.56 0.43,0.57, body extent -0.53,-0.27 0.53,0.27, height 0.25
FP-GRM033-0_03-IPC_C#2 [mm]
  rect 0.354x0.263 smd paste+0 mask+0: 1(-0.254,0) ""(0.254,0)
  silkscreen extent -0.43,-0.56 0.43,0.56, body extent -0.53,-0.27 0.53,0.27, height 0.25
FP-RN73R2B-IPC_A [mm]
  rect 1.355x1.906 smd paste+0 mask+0: 1(-1.575,0) 2(1.575,0)
  silkscreen extent -0.6,-0.95 0.6,0.95, body extent -2.75,-1.45 2.75,1.45, height 0.25
FP-RN731J-MFG [mm]
  rect 1x0.9 smd paste+0 mask+0: 1(-0.9,0) 2(0.9,0)
  silkscreen extent -0.78,-0.82 0.78,0.82, body extent -1.5,-0.55 1.5,0.55, height 0.25
FP-RQ731J-IPC_C [mm]
  rect 0.71x0.812 smd paste+0 mask+0: 1(-0.626,0) 2(0.626,0)
  silkscreen extent -0.98,-0.85 0.98,0.85, body extent -1.08,-0.55 1.08,0.55, height 0.25
FP-SOT-223-0046067_14-MFG [mm]
  rect 1.5x1.2 smd paste+0 mask+0: 1(-3.2,2.3) 2(-3.2,0) 3(-3.2,-2.3)
  rect 1.5x3.3 smd paste+0 mask+0: 4(3.2,0)
  silkscreen extent -4.83,-3.35 1.85,3.35, body extent -4.05,-3.45 4.05,3.45, height 0.25
STM-LQFP64_L [mm] "QFP, 64-Leads, Body 10x10mm, Pitch 0.5mm, IPC High Density"
  oval 1.6x0.3 smd: 1(-5.8,3.75) 2(-5.8,3.25) 3(-5.8,2.75) 4(-5.8,2.25) 5(-5.8,1.75) 6(-5.8,1.25) 7(-5.8,0.75) 8(-5.8,0.25) 9(-5.8,-0.25) 10(-5.8,-0.75) 11(-5.8,-1.25) 12(-5.8,-1.75) 13(-5.8,-2.25) 14(-5.8,-2.75) 15(-5.8,-3.25) 16(-5.8,-3.75) 33(5.8,-3.75) 34(5.8,-3.25) 35(5.8,-2.75) 36(5.8,-2.25) 37(5.8,-1.75) 38(5.8,-1.25) 39(5.8,-0.75) 40(5.8,-0.25) 41(5.8,0.25) 42(5.8,0.75) 43(5.8,1.25) 44(5.8,1.75) 45(5.8,2.25) 46(5.8,2.75) 47(5.8,3.25) 48(5.8,3.75)
  oval 0.3x1.6 smd: 17(-3.75,-5.8) 18(-3.25,-5.8) 19(-2.75,-5.8) 20(-2.25,-5.8) 21(-1.75,-5.8) 22(-1.25,-5.8) 23(-0.75,-5.8) 24(-0.25,-5.8) 25(0.25,-5.8) 26(0.75,-5.8) 27(1.25,-5.8) 28(1.75,-5.8) 29(2.25,-5.8) 30(2.75,-5.8) 31(3.25,-5.8) 32(3.75,-5.8) 49(3.75,5.8) 50(3.25,5.8) 51(2.75,5.8) 52(2.25,5.8) 53(1.75,5.8) 54(1.25,5.8) 55(0.75,5.8) 56(0.25,5.8) 57(-0.25,5.8) 58(-0.75,5.8) 59(-1.25,5.8) 60(-1.75,5.8) 61(-2.25,5.8) 62(-2.75,5.8) 63(-3.25,5.8) 64(-3.75,5.8)
  silkscreen extent -5.92,-4.6 4.6,4.6, body extent -5,-5 5,5, height 1.6
"TIM 3.5SM SINGLE_TRP" [mil]
  rect 63x41 smd paste+0 mask+0: 1(-339,352.52) 2(-339,252.52) 7(-339,-247.48) 8(-339,-347.48) 9(339,-350) 10(339,-250) 16(339,350)
  silkscreen extent -289,-484 289,484

## Part data
C1 C19 C20 C22 C23 C24: library part CMP-1038-02198-3, "CAP CER 10UF 10V X7R 1210", Capacitance=10uF, Case Code (Imperial)=1210, Case Code (Metric)=3225, Dielectric=X7R, Max Operating Temperature=125°C, Min Operating Temperature=-55°C, Package Quantity=1, Tolerance=10%, Voltage=10V, Case/Package=1210, Construction=Flat, Depth=2.5mm, Dissipation Factor=5%, Height=2.79mm, Lead Free="Lead Free", Length=3.2mm, Mount="Surface Mount", Packaging="Tape and Reel", Radiation Hardening=No, REACH SVHC="No SVHC", RoHS Compliant=Yes, Series=1210, Termination=SMD/SMT, Thickness=0.11inch, Voltage Rating=10V, Voltage Rating (DC)=10V, Width=0.098inch
C2 C13: library part CMP-2006-04292-1, Manufacturer="AVX Interconnect / Elco", Part Number=06035A300JAT2A
C3 C4 C5 C6 C7 C8 C9 C10 C11 C12 C14 C16 C18 C21 C25 C26: library part CMP-2010-01264-2, "Chip Multilayer Ceramic Capacitors for General Purpose, 0201, 0.10uF, X5R, 15%, 10%, 10V", Capacitance=100nF, Case Code (Imperial)=0201, Case Code (Metric)=0603, Dielectric=X5R, Max Operating Temperature=85°C, Min Operating Temperature=-55°C, Package Quantity=1, Tolerance=10%, Voltage=10V, Case/Package=0201, Depth=0.3mm, Height=0.3mm, Lead Free="Lead Free", Length=0.6mm, Mount="Surface Mount", Packaging="Tape and Reel", Radiation Hardening=No, REACH SVHC="No SVHC", Termination=SMD/SMT, Thickness=0.013inch, Voltage Rating=10V, Voltage Rating (DC)=10V, Weight=6E-06oz, Width=0.012inch
C15: library part CMP-2007-04663-1, Manufacturer="AVX Interconnect / Elco", Part Number=0805YD105MAT2A
C17: library part CMP-03422-000187-1, "CC0603 2.2 uF X5R 10.00% 16 V", Capacitance="2.2 uF", Manufacturer=YAGEO, Package=CC0603-DA, Temperature="-55°C to +125°C", Temperature Characteristic=X5R, Temperature Coefficient=15%, Temperature Range High=+125°C, Temperature Range Low=-55°C, Tolerance=0.1, Voltage="16 V", Automotive=No, Category=Cap, ComponentLink2Description=Datasheet, ComponentLink2URL=http://www.yageo.com/documents/recent/UPY-GPHC_X7R_6.3V-to-50V_18.pdf, Device Class L1="Passive Components", Device Class L2=Capacitors, Device Class L3="Ceramic Capacitors", Footprint Url=http://www.yageo.com/exep/pages/download/literatures/UPY-C_GEN_24.pdf, Height=0.9mm, Lead Free=Yes, Manufacturer Part Number=CC0603KPX5R7BB225, Material=Ceramic, Octopart=https://octopart.com/cc0603kpx5r7bb225-yageo-91091799, RoHS=TRUE, Voltage Rating="16 V"
D1: library part CMP-44529-000064-1, "LED YELLOW CLEAR CHIP SMD", Case Code (Imperial)=0805, Case Code (Metric)=2012, Color=Yellow, Forward Current=20mA, Forward Voltage=2V, Illumination Color=Green, Lens Color=Clear, Max Operating Temperature=85°C, Min Operating Temperature=-40°C, Package Quantity=2000, Case/Package=0805, Dominant Wavelength=590nm, Height=0.4mm, Lead Free="Lead Free", Length=2mm, Lens Style=Clear, Luminous Intensity=150mcd, Mount="Surface Mount", Number of LEDs=1, Number of Pins=2, Packaging="Tape and Reel", RoHS Compliant=Yes, Series=APHCM, Test Current=20mA, Viewing Angle=110°, Wavelength=590nm, Width=1.25mm
D2: library part CMP-44529-000045-1, "LED GREEN CLEAR 1608 SMD", Case Code (Imperial)=0603, Case Code (Metric)=1608, Color=Green, Forward Voltage=2.65V, Lens Color=Colorless, Test Current=2mA, Case/Package=0603, Dominant Wavelength=525nm, Height=0.75mm, Length=1.6mm, Lens Size=0.7mm, Lens Style=Round, Lens Transparency=Clear, Luminous Intensity=180mcd, Mount="Surface Mount", Packaging="Tape and Reel", Viewing Angle=100°, Width=0.8mm
F1: library part CMP-08606-000003-1, "PTC RESET FUSE 16V 750MA 1206", Current Rating=100A, Hold Current=0.75A, Manufacturer="Littelfuse Inc", Package=1206L, Resistance=0.09-0.29Ω, Temperature="-40°C to +85°C", Temperature Range High=+85°C, Temperature Range Low=-40°C, Trip Current=1.5A, Voltage Rating=16V, Automotive=No, Category=Fuse, ComponentLink2Description=Datasheet, ComponentLink2URL=https://www.littelfuse.com/~/media/electronics/datasheets/resettable_ptcs/littelfuse_ptc_1206l_datasheet.pdf.pdf, Device Class L1="Circuit Protection", Device Class L2="PTC Resettable Fuses", Device Class L3=unset, Digikey Description="PTC RESET FUSE 16V 750MA 1206", Height=1.25mm, Lead Free=Yes, Manufacturer Part Number=1206L075/16WR, Mouser Description="Resettable Fuses - PPTC 16V 0.75A 1206 PTC", Octopart=https://octopart.com/1206l075%2F16wr-littelfuse-28867102, RoHS=TRUE, Trip Time=0.2s
FB1: library part CMP-06046-002018-1, "Ferrite Bead, 0201, 75Ω @ 100MHz, 25%, 1Ω, 200mA", Case/Package=0201, DC Resistance (DCR)=1R, Max Current Rating=200mA, Max Operating Temperature=125°C, Min Operating Temperature=-55°C, Ratings=AEC-Q200, Mount="Surface Mount", Number of Lines=1, RoHS Compliant=Yes
J1 J2 J3 J4 J5 J7 J8 J9 J10 J11: Package=None, Availability=Unavailable, MP=348250240, Price=None
J6: library part CMP-17439-000399-1, "CONN HEADER VERT 16POS 2MM", Color=Natural, Contact Resistance=20mR, Current Rating=3A, Flammability Rating="UL94 V-0", Housing Color=Beige, Max Operating Temperature=85°C, Max Voltage Rating (AC)=250V, Min Operating Temperature=-25°C, Connector Type=Header, Contact Finish - Mating=TIN, Contact Material="Copper Alloy", Contact Mating Length=0.114inch, Contact Plating=Copper, Contact Shape=Square, Contact Type="Male Pin", Depth=5mm, Fastening Type=Detent, Gender=Male, Height=9.5mm, Housing Material=Polyamide, Insulation Color=Natural, Insulation Material=Nylon, Lead Free="Lead Free", Length=17.9mm, Mated Stacking Heights=8.8mm, Max Current Rating=3A, Mount="Through Hole", Number of Contacts=16, Number of Positions=16, Number of Rows=2, Orientation=Straight, Packaging=Bulk, Pitch=2mm, Row Spacing=0.079inch, Series=PHD, Termination=Solder, Voltage Rating=250V, Width=5mm
J12: library part CMP-17439-000382-1, "CONN HEADER VERT 5POS 2.5MM", Color=Natural, Current Rating=3A, Flammability Rating="UL94 V-0", Housing Color=White, Voltage Rating=250V, Connector Type=Header, Contact Finish - Mating=TIN, Contact Material=Brass, Contact Mating Length=0.13inch, Contact Plating=Tin, Contact Shape=Square, Contact Type="Male Pin", Fastening Type=Friction, Gender=Male, Insulation Color=Natural, Insulation Material=Nylon, Lead Free="Lead Free", Mated Stacking Heights=8.1mm, Mount="Through Hole", Number of Contacts=5, Number of Positions=5, Number of Rows=1, Orientation=Straight, Packaging=Bulk, Pitch=2.5mm, Series=EH, Termination=Solder
PS1 PS2: "0.5A DC/DC-Converter 'INNOLINE' SIP3 reg", Package="SIP-3 Recom Power", Check_prices=https://www.snapeda.com/parts/R-78E3.3-0.5/Recom+Power/view-part/?ref=eda, Digi-Key_Part_Number=945-1661-5-ND, MF="Recom Power", MP=R-78E3.3-0.5, Purchase-URL=https://pricing.snapeda.com/search/part/R-78E3.3-0.5/?ref=eda, SnapEDA_Link=https://www.snapeda.com/parts/R-78E3.3-0.5/Recom+Power/view-part/?ref=snap
R1 R2 R3 R4 R5 R6 R7 R8 R9 R10 R11 R12 R13 R14 R15 R16 R17 R18 R19 R20 R21 R22 R23 R24 R25 R26 R27 R28 R29 R30 R31 R32 R33 R34 R35 R36 R37 R38 R39 R40 R41 R42 R43 R44 R45 R46 R47 R48 R49 R50 R51 R52 R53 R54 R55 R56 R57 R58 R59 R60 R61 R62 R63 R64 R65 R66 R67 R68 R69 R70 R71 R72 R73 R74 R75 R76 R77 R78 R79 R80 R81 R82 R83 R84 R85 R86 R87 R88 R89 R90 R91 R92 R93 R94 R95 R96 R97 R98 R99 R100 R101 R102 R103 R104 R105 R106 R107 R108 R109 R110 R111 R112 R113 R114 R115 R116 R117 R118 R119 R120: library part CMP-04015-056270-1, "3kΩ ±0.1% 0.25W, 1/4W Chip Resistor 1206 (3216 Metric) Moisture Resistant Thin Film"
R121: library part CMP-03211-001316-1, "RQ73 0603 100KΩ  0.15W 10ppm/°C 0.1% 75V", Manufacturer=TE, Package=RQ731J, Power Rating=0.15W, Resistance=100KΩ, Temperature="-55°C to +155°C", Temperature Coefficient=10ppm/°C, Temperature Range High=+155°C, Temperature Range Low=-55°C, Tolerance=0.1%, Voltage Rating=75V, Automotive=Yes, Automotive Grade="Grade 0", Category=Res, ComponentLink2Description=Datasheet, ComponentLink2URL=https://www.te.com/commerce/DocumentDelivery/DDEController?Action=showdoc&DocId=Data+Sheet%7F1773270-2%7FA%7Fpdf%7FEnglish%7FENG_DS_1773270-2_A.pdf%7F4-2176362-2, Composition="Thin Film", Device Class L1="Passive Components", Device Class L2=Resistors, Device Class L3="Chip SMD Resistors", Height=0.6mm, Ipc Land Pattern Name=RESC15580X45, Lead Free=Yes, Manufacturer Part Number=RQ73C1J100KBTD, Octopart=https://octopart.com/rq73c1j100kbtd-te+connectivity-93908182, RoHS=TRUE, Series=RQ73
R122 R123: library part CMP-00287-116338145-1, "ERJH3GJ331V Res 330 Ohm 5% 1/8W 0603", NexarPartId=116338145
R124: library part CMP-03211-006130-1, "Thin Film Resistors RN 0603 10KΩ 0.1% 10ppm/°C", Manufacturer="TE Connectivity", Package=RN731J, Power Rating=0.063W, Resistance=10KΩ, Temperature="-55°C to +155°C", Temperature Coefficient=10ppm/°C, Temperature Range High=+155°C, Temperature Range Low=-55°C, Tolerance=0.1%, Voltage Rating=50V, Automotive=No, Category=Res, ComponentLink2Description=Datasheet, ComponentLink2URL=https://www.te.com/commerce/DocumentDelivery/DDEController?Action=showdoc&DocId=Data+Sheet%7F1773270%7FP%7Fpdf%7FEnglish%7FENG_DS_1773270_P.pdf%7F9-1614352-9, Composition="Thin Film", Device Class L1="Passive Components", Device Class L2=Resistors, Device Class L3="Chip SMD Resistors", Height=0.55mm, Ipc Land Pattern Name=RESC15580X45, Lead Free=Yes, Manufacturer Part Number=RN73C1J10KB, Octopart=https://octopart.com/rn73c1j10kb-te+connectivity-47108040, octopart_url=https://octopart.com/rn73c1j10kb-te+connectivity-47108040, RoHS=TRUE, Series=RN73
SW1: library part CMP-03407-000026-1, "SWITCH TACTILE SPST-NO 0.05A 24V", RoHS Compliant=Yes
U1 U2 U3 U4 U5 U11 U12 U13 U14 U15: library part CMP-04892-000038-1, "IC MUX/DEMUX 1X16 24SSOP", Case/Package=SSOP, High Level Output Current=25mA, Max Operating Temperature=125°C, Max Supply Current=8uA, Max Supply Voltage=6V, Min Operating Temperature=-55°C, Min Supply Voltage=2V, On-State Resistance=160R, Package Quantity=2000, Bandwidth=89MHz, Contact Plating=Gold, Height=1.95mm, Lead Free="Lead Free", Length=8.2mm, Logic Function=Multiplexer, Low Level Output Current=25mA, Max Output Current=25mA, Mount="Surface Mount", Number of Bits=16, Number of Channels=1, Number of Circuits=16, Number of Inputs=16, Number of Outputs=1, Number of Pins=24, Operating Supply Current=8uA, Packaging="Tape and Reel", Polarity=Non-Inverting, Propagation Delay=75ns, Radiation Hardening=No, REACH SVHC="No SVHC", Series=74HC, Supply Type=Single, Termination=SMD/SMT, Turn-Off Delay Time=290ns, Turn-On Delay Time=300ns, Weight=0.006081oz, Width=5.3mm
U6: library part CMP-01539-89931857-1, "TIM 3.5-0911SM 3.5 Watt DC/DC converter, medical, 4: 1 input, 5000 VAC I/O-isolation (2 x MOPP), low leakage current, encapsulated,...", Output Power=3.5W, Height=10.5mm, NexarPartId=89931857, Number of Outputs=1, RoHS=Compliant, Width=14.4mm
U7: library part CMP-04872-000178-1, "IC TRANSCEIVER 1/1 SOT23-8", Case/Package=SOT-23-8, Max Operating Temperature=125°C, Min Operating Temperature=-40°C, Data Rate=1Mbps, Lead Free="Lead Free", Mount="Surface Mount", Packaging="Tape and Reel", RoHS Compliant=Yes
U9: library part CMP-04872-000209-1, "DGTL ISO 5700VRMS 4CH GP 16SOIC", Case/Package=SOIC, Isolated Power=No, Max Operating Temperature=125°C, Max Supply Voltage=5.5V, Min Operating Temperature=-55°C, Min Supply Voltage=2.25V, Channel Type=Unidirectional, Data Rate=100Mbps, Lead Free="Lead Free", Number of Channels=4, Number of Pins=16, Packaging=Rail/Tube, Propagation Delay=16ns, Pulse Width Distortion (PWD)=4.1ns, REACH SVHC="No SVHC", RoHS Compliant=Yes, Type="General Purpose"
U10: library part CMP-0243-00218-1, "ARM Cortex-M4 32-bit MCU+FPU, 512 KB Flash, 128 KB Internal RAM, 50 I/Os, 64-Pin LQFP, -40 to 85 degC, Tray", I/Os (High Current)=50, Operating Frequency(F) (Processor speed) (MHz)=180, Package Description=LQFP64, Package Reference="64-Pin Low-profile Quad Flat Package, Body 10 x 10 mm, Pitch 0.5 mm", Supply Voltage(Vcc) min (V)=1.7, ComponentLink1Description="Manufacturer URL", ComponentLink1URL=http://www.st.com/, ComponentLink2Description=Datasheet, ComponentLink2URL=http://www.st.com/st-web-ui/static/active/en/resource/technical/document/datasheet/DM00141306.pdf, Core="ARM Cortex-M4", D/A Converter=2, DatasheetVersion="Rev. 6", FLASH Size (Prog) (kB)=512, Internal RAM Size (kB)=128, Mounting Technology="Surface Mount", Packing=Tray
U16: library part CMP-0244-00307-2, "IC REG LINEAR 3.3V 800MA SOT223", Case/Package=SOT-223, Dropout Voltage=1.1V, Input Bias Current=5mA, Max Input Voltage=15V, Max Operating Temperature=125°C, Max Output Current=1.3A, Max Output Voltage=3.3V, Max Power Dissipation=12W, Min Input Voltage=5.3V, Min Operating Temperature=-40°C, Output Current=950mA, Output Voltage Accuracy=1%, Package Quantity=1, Quiescent Current=10mA, Accuracy=1%, Contact Plating=Tin, Height=1.8mm, Lead Free="Lead Free", Length=6.5mm, Max Supply Voltage=15V, Min Output Voltage=3.3V, Min Supply Voltage=3.3V, Mount="Surface Mount", Nominal Output Voltage=3.3V, Number of Outputs=1, Number of Pins=4, Number of Regulators=1, Number of Terminals=4, Output Type=Fixed, Output Voltage=3.3V, Packaging="Tape and Reel", Polarity=Positive, Power Dissipation=12W, Radiation Hardening=No, REACH SVHC="No SVHC", Termination=SMD/SMT, Weight=0.01lb, Width=3.5mm
Y1: library part CMP-27762-009874-1, "CRYSTAL 8.0000MHZ 18PF SMD", Case/Package=SMD/SMT, ESR (Equivalent Series Resistance)=80R, Frequency=8MHz, Frequency Stability=50ppm, Frequency Tolerance=20ppm, Load Capacitance=18pF, Max Operating Temperature=70°C, Min Operating Temperature=-20°C, Operating Frequency="8 MHz", Package Quantity=1000, Accuracy=20ppm, Contact Plating=Tin, Depth=4.7mm, Height=0.165inch, Lead Free="Lead Free", Length=11.4mm, Mount="Surface Mount", Number of Pins=2, Packaging="Tape and Reel", Radiation Hardening=No, REACH SVHC="No SVHC", Series=ABLS, Series Resistance=80R, Termination=SMD/SMT, Tolerance=20ppm, Width=4.7mm

## Free pads (board coordinates)
  round 1.524 hole 6: 9(-232.918,-3.556) 9(-232.41,-104.14) 9(-4.309,-104.53) 9(-4.182,-4.454)

## Via types
v1: diameter 1.27, hole 0.711, Top Layer to Bottom Layer, 278 vias
v2: diameter 0.711, hole 0.711, Top Layer to Bottom Layer, 4 vias
v3: diameter 1, hole 0.711, Top Layer to Bottom Layer, 1 vias

## Nets (pads, with @x,y where several pads share a name; then routed paths per layer and width w, separated by ;. In a path a pad name is that pad's centre, name@x,y a point inside that pad or via, vN(x,y) a via of type N, cw(c..) or ccw(c..) an arc to the next point about the centre after c; other vN are vias at no path point)
GND: C2.2 C3.2 C4.2 C5.2 C6.2 C7.2 C8.2 C9.2 C11.2 C12.2 C13.1 C14.2 C15.1 C16.2 C17.2 C18.2 C19.1 C20.2 C21.2 C22.1 C25.2 C26.2 J1.2 J1.4 J1.6 J1.8 J1.10 J1.12 J1.14 J1.16 J1.18 J1.20 J1.22 J1.24 J2.2 J2.4 J2.6 J2.8 J2.10 J2.12 J2.14 J2.16 J2.18 J2.20 J2.22 J2.24 J3.2 J3.4 J3.6 J3.8 J3.10 J3.12 J3.14 J3.16 J3.18 J3.20 J3.22 J3.24 J4.2 J4.4 J4.6 J4.8 J4.10 J4.12 J4.14 J4.16 J4.18 J4.20 J4.22 J4.24 J5.2 J5.4 J5.6 J5.8 J5.10 J5.12 J5.14 J5.16 J5.18 J5.20 J5.22 J5.24 J7.2 J7.4 J7.6 J7.8 J7.10 J7.12 J7.14 J7.16 J7.18 J7.20 J7.22 J7.24 J8.2 J8.4 J8.6 J8.8 J8.10 J8.12 J8.14 J8.16 J8.18 J8.20 J8.22 J8.24 J9.2 J9.4 J9.6 J9.8 J9.10 J9.12 J9.14 J9.16 J9.18 J9.20 J9.22 J9.24 J10.2 J10.4 J10.6 J10.8 J10.10 J10.12 J10.14 J10.16 J10.18 J10.20 J10.22 J10.24 J11.2 J11.4 J11.6 J11.8 J11.10 J11.12 J11.14 J11.16 J11.18 J11.20 J11.22 J11.24 J12.4 PS2.2 R121.1 SW1.3 SW1.4 U1.12 U1.15 U2.12 U2.15 U3.12 U3.15 U4.12 U4.15 U5.12 U5.15 U6.10 U9.9 U9.15 U10.12 U10.18 U10.31 U10.47 U10.63 U11.12 U11.15 U12.12 U12.15 U13.12 U13.15 U14.12 U14.15 U15.12 U15.15 U16.1 | length 610.2
  Top Layer w0.15: v1(-154.964,-59.671) -154.964,-59.793 -154.191,-60.566 U10.12@-152.99,-60.566 ; v3(-152.01,-65.668) -151.985,-65.693 -150.763,-65.693 -150.448,-65.379 -150.448,-64.625 U10.18@-150.44,-64.616 ; U10.63@-150.44,-53.016 -150.44,-44.794 v1(-150.232,-44.586) -150.232,-44.861 -149.741,-45.352 -149.741,-45.712 -148.835,-46.618 R121.1@-148.835,-47.262 ; U10.31@-143.94,-64.616 -143.94,-65.548 -143.882,-65.606 ; v1(-141.977,-67.319) -142.252,-67.319 -142.708,-67.775 -143.563,-67.775 -143.882,-67.455 C21.2@-143.882,-67.319 ; U10.47@-141.39,-55.566 -140.489,-55.566 -140.371,-55.448 -139.758,-55.448 v1(-139.564,-55.254) ; C21.2@-143.882,-67.319 -143.882,-65.606 ; C21.2@-143.882,-67.319 -143.882,-65.606 ; C21.2@-143.882,-67.319 -143.882,-65.606
  Top Layer w0.254: v2(-219.066,-38.363) -218.431,-38.998 -218.199,-38.998 -218.064,-38.863 -217.853,-38.863 C12.2@-217.845,-38.871 ; U1.15@-216.853,-68.727 -216.822,-68.758 -215.971,-68.758 -215.596,-69.133 -215.596,-69.975 -214.816,-70.755 -213.974,-70.755 -213.356,-70.136 -213.356,-68.081 v1(-213.523,-67.914) ; U15.12@-216.218,-47.018 -214.32,-47.018 -213.858,-47.48 -212.761,-47.48 -211.662,-46.381 v1(-211.662,-46.364) ; v1(-211.7,-44.332) -210.859,-45.173 -210.859,-45.178 -210.35,-45.687 -209.499,-45.687 U15.15@-209.468,-45.718 ; U1.12@-210.103,-67.427 -204.273,-67.427 -203.605,-68.095 -203.605,-68.387 -202.937,-69.056 ; v1(-202.937,-69.732) -202.937,-69.056 ; C3.2@-202.683,-68.462 -202.81,-68.589 -202.81,-69.183 -202.937,-69.056 ; C14.2@-185.792,-58.429 -185.792,-58.334 -182.585,-55.127 v1(-182.49,-55.127) ; C11.2@-183.506,-38.44 -183.506,-38.058 -183.057,-37.609 -182.521,-37.609 -181.878,-36.966 v1(-181.728,-36.966) ; SW1.4@-182.327,-60.285 -182.49,-60.122 v1(-182.49,-55.127) ; SW1.3@-182.327,-51.085 -182.49,-51.248 v1(-182.49,-55.127) ; v1(-181.474,-68.843) -181.199,-68.843 -180.956,-68.6 U2.15@-179.261,-68.6 ; U14.12@-178.413,-46.256 -178.403,-46.247 -175.133,-46.247 v1(-175.124,-46.237) ; U2.12@-172.511,-67.3 -172.145,-67.3 -172.071,-67.226 -172.071,-66.86 -171.387,-66.176 -166.632,-66.176 v1(-166.615,-66.193) ; U14.15@-171.662,-44.956 -168.52,-44.956 -168.344,-44.78 -167.571,-44.78 v1(-167.377,-44.586) ; C13.1@-165.656,-64.597 C13.1@-165.457,-64.398 -165.293,-64.234 -165.293,-62.864 -164.668,-62.239 v1(-163.313,-62.239) -163.313,-60.884 -162.759,-60.33 -160.172,-60.33 C15.1@-159.922,-60.08 ; C2.2@-163.948,-49.397 -163.088,-49.397 -161.706,-48.015 ; C16.2@-161.408,-62.874 -161.408,-64.049 -163.044,-65.685 -164.173,-65.685 -164.664,-66.176 ; C4.2@-160.9,-70.367 C4.2@-160.896,-70.317 ; C26.2@-156.332,-49.131 -159.124,-49.131 v1@-160.24,-48.015 ; v1(-152.137,-69.732) C18.2@-152.137,-67.7 ; C5.2@-147.946,-74.558 v1(-147.946,-76.082) -147.754,-76.082 -144.44,-72.768 C17.2@-144.39,-72.768 ; v1(-137.584,-52.587) C25.2@-136.389,-52.587 ; U3.15@-136.97,-69.235 -135.37,-69.235 -135.127,-69.478 v1(-134.852,-69.478) ; U13.12@-135.7,-45.875 -133.508,-45.875 -133.108,-45.475 v1(-132.833,-45.475) -132.853,-45.455 -132.853,-43.677 -132.238,-43.062 -131.396,-43.062 -130.801,-43.657 -130.801,-43.981 -130.207,-44.575 U13.15@-128.95,-44.575 ; U3.12@-130.22,-67.935 -130.22,-67.192 -130.42,-66.991 -130.42,-66.13 -129.946,-65.655 v1(-129.946,-65.38) ; v1(-108.406,-67.557) -108.131,-67.557 -107.905,-67.33 U4.15@-106.617,-67.33 ; v2(-100.698,-36.962) -100.698,-37.086 -100.325,-37.458 C9.2@-100.325,-37.933 ; U4.12@-99.867,-66.03 -99.836,-66.061 -98.198,-66.061 v1(-98.168,-66.091) -98.025,-65.948 -95.469,-65.948 -93.844,-67.573 ; U12.12@-98.489,-45.621 -98.437,-45.674 -97.768,-45.674 -96.569,-46.872 -95.281,-46.872 -94.685,-46.277 -94.685,-45.856 v1@-94.481,-45.652 ; v1(-94.177,-45.475) -94.354,-45.652 v1@-94.481,-45.652 ; v1(-92.447,-66.049) -92.324,-66.172 -92.324,-67.904 -92.32,-67.908 C6.2@-92.32,-67.954 ; U12.15@-91.739,-44.321 -93.038,-44.321 -93.165,-44.448 -93.559,-44.448 -93.707,-44.597 -93.707,-44.701 v1@-94.148,-45.142 ; C20.2@-79.9,-58.937 -79.874,-58.911 v1(-79.874,-56.397) ; C19.1@-63.364,-52.561 C19.1@-63.021,-52.561 ; C19.1@-62.945,-52.561 C19.1@-63.021,-52.561 ; C8.2@-61.967,-38.503 -61.84,-38.63 v2(-61.84,-39.76) ; v1(-59.427,-67.297) -59.298,-67.426 -57.499,-67.426 U5.15@-57.468,-67.457 ; U11.12@-58.538,-45.139 -59.248,-45.139 -59.838,-45.729 -61.713,-45.729 v1(-63.745,-47.761) C19.1@-63.745,-51.836 ; U11.15@-51.788,-43.839 -51.78,-43.831 -45.083,-43.831 v1(-45.076,-43.824) -45.012,-43.888 -36.122,-43.888 U9.9@-36.059,-43.951 ; U16.1@-51.147,-57.808 -51.034,-57.921 v1(-47.997,-57.921) -47.959,-57.959 -47.13,-57.959 -46.318,-57.148 -45.546,-57.148 C22.1@-44.822,-56.423 ; U5.12@-50.718,-66.157 -50.049,-66.157 -49.383,-65.492 -49.09,-65.492 -48.124,-64.525 v1(-47.997,-64.525) -46.219,-64.525 -44.06,-66.684 C7.2@-44.06,-68.462 ; v1(-44.822,-51.571) U9.15@-36.059,-51.571 ; v1(-36.948,-77.479) -35.488,-76.019 U6.10@-35.488,-74.507 ; v1@-166.615,-66.176 -164.664,-66.176 ; v1@-166.615,-66.176 -164.664,-66.176 ; v1@-166.615,-66.176 -164.664,-66.176 ; -164.664,-66.176 -163.821,-66.176 -160.904,-69.093 C4.2@-160.904,-70.317 ; -161.706,-48.015 v1@-160.24,-48.015 ; -161.706,-48.015 v1@-160.24,-48.015 ; -161.706,-48.015 v1@-160.24,-48.015 ; C4.2@-160.904,-70.317 C4.2@-160.896,-70.317 ; C4.2@-160.904,-70.317 C4.2@-160.896,-70.317 ; C4.2@-160.904,-70.317 C4.2@-160.896,-70.317 ; v1@-94.481,-45.652 v1@-94.481,-45.142 ; v1@-94.481,-45.652 v1@-94.481,-45.142 ; v1@-94.481,-45.652 v1@-94.481,-45.142 ; v1@-94.481,-45.142 v1@-94.148,-45.142 ; v1@-94.481,-45.142 v1@-94.148,-45.142 ; v1@-94.481,-45.142 v1@-94.148,-45.142 ; C19.1@-63.745,-51.836 C19.1@-63.021,-52.561 ; C19.1@-63.745,-51.836 C19.1@-63.021,-52.561 ; C19.1@-63.745,-51.836 C19.1@-63.021,-52.561
  Layer 1 w0.254: J1.24@-223.867,-93.227 -222.685,-94.408 -221.034,-94.408 J1.22@-219.853,-93.227 ; v1(-187.824,-90.585) -187.824,-92.922 -185.817,-94.929 -182.465,-94.929 -181.068,-93.532 J2.22@-181.068,-93.278 ; J2.12@-161.078,-93.532 J2.12@-161.078,-93.278 ; J4.22@-103.877,-93.227 -102.696,-94.408 -101.07,-94.408 ; J4.8@-103.877,-91.017 J4.8@-104.106,-91.017 ; J4.20@-99.889,-93.227 -101.07,-94.408 ; J4.18@-95.876,-93.227 -97.057,-94.408 ; J4.16@-91.888,-93.227 -93.069,-94.408 ; J4.4@-87.875,-91.017 J4.4@-88.104,-91.017 ; J4.14@-87.85,-93.354 J4.14@-87.85,-93.227 ; J4.12@-83.887,-93.227 -85.068,-94.408 -86.694,-94.408 J4.14@-87.875,-93.227 -87.875,-94.259 -88.024,-94.408 -93.069,-94.408 ; J4.2@-83.887,-91.017 J4.2@-84.116,-91.017 ; J5.20@-60.799,-93.227 -59.617,-94.408 -55.604,-94.408 ; J5.18@-56.785,-93.227 -55.604,-94.408 ; J5.16@-52.798,-93.227 -51.616,-94.408 ; J5.4@-48.784,-91.017 J5.14@-48.784,-93.227 -47.603,-94.408 ; J5.12@-44.797,-93.227 -45.978,-94.408 -47.603,-94.408 ; J4.8@-104.106,-91.22 J4.8@-104.106,-91.017 ; J4.8@-104.106,-91.22 J4.8@-103.852,-91.22 ; J4.8@-104.106,-91.22 J4.8@-104.106,-91.017 ; J4.8@-104.106,-91.22 J4.8@-103.852,-91.22 ; J4.8@-104.106,-91.22 J4.8@-104.106,-91.017 ; J4.8@-104.106,-91.22 J4.8@-103.852,-91.22 ; -101.07,-94.408 -97.057,-94.408 ; -97.057,-94.408 -93.069,-94.408 ; J4.4@-88.104,-91.22 J4.4@-88.104,-91.017 ; J4.4@-88.104,-91.22 J4.4@-87.85,-91.22 ; J4.4@-88.104,-91.22 J4.4@-87.85,-91.22 ; J4.4@-88.104,-91.22 J4.4@-88.104,-91.017 ; J4.4@-88.104,-91.22 J4.4@-87.85,-91.22 ; J4.4@-88.104,-91.22 J4.4@-88.104,-91.017 ; J4.2@-84.116,-91.22 J4.2@-84.116,-91.017 ; J4.2@-84.116,-91.22 J4.2@-83.862,-91.22 ; J4.2@-84.116,-91.22 J4.2@-83.862,-91.22 ; J4.2@-84.116,-91.22 J4.2@-84.116,-91.017 ; J4.2@-84.116,-91.22 J4.2@-84.116,-91.017 ; J4.2@-84.116,-91.22 J4.2@-83.862,-91.22 ; -55.604,-94.408 -51.616,-94.408 ; -51.616,-94.408 -47.603,-94.408
  Layer 2 w0.254: J11.2@-222.952,-17.586 -221.771,-18.767 -220.145,-18.767 J11.4@-218.964,-17.586 ; J1.14@-203.851,-93.227 -203.721,-93.357 -203.721,-94.259 -203.573,-94.408 -201.045,-94.408 J1.12@-199.864,-93.227 ; J2.22@-181.068,-93.278 -179.886,-94.459 -178.261,-94.459 J2.20@-177.08,-93.278 ; v1(-175.124,-46.237) -169.132,-46.237 ; v1(-146.676,-87.893) -146.676,-89.925 -145.99,-89.925 J3.10@-145.99,-91.017 ; J9.20@-129.734,-15.249 -128.553,-14.068 -126.927,-14.068 J9.22@-125.746,-15.249 -124.565,-14.068 -122.914,-14.068 J9.24@-121.733,-15.249 ; J4.8@-103.877,-91.017 -103.541,-91.017 -102.36,-89.836 -101.381,-89.836 -100.2,-91.017 J4.6@-99.889,-91.017 -91.552,-91.017 -90.371,-89.836 -89.392,-89.836 -88.211,-91.017 J4.4@-87.875,-91.017 -87.539,-91.017 -86.358,-89.836 -85.379,-89.836 -84.198,-91.017 J4.2@-83.887,-91.017 ; J8.6@-91.126,-17.459 -89.945,-18.64 -88.319,-18.64 J8.8@-87.138,-17.459 ; J8.22@-87.138,-15.249 -85.957,-14.068 -84.306,-14.068 J8.24@-83.125,-15.249 ; J5.24@-68.8,-93.227 -68.463,-93.227 -67.282,-94.408 -66.304,-94.408 -65.123,-93.227 J5.22@-64.786,-93.227 -63.605,-94.408 -61.98,-94.408 J5.20@-60.799,-93.227 ; v1(-187.824,-90.585) J2.24@-185.081,-93.329 ; v1(-187.824,-90.585) J2.24@-185.081,-93.329 ; v1(-187.824,-90.585) J2.24@-185.081,-93.329 ; J2.24@-185.081,-93.329 J2.24@-185.081,-93.278 -184.83,-93.529 -184.83,-94.189 -184.547,-94.472 -182.338,-94.472 ; -182.338,-94.472 J2.22@-181.093,-93.227 ; -182.338,-94.472 J2.22@-181.093,-93.227 ; -182.338,-94.472 J2.22@-181.093,-93.227 ; -169.132,-46.237 ccw(c-169.133,-45.983) -168.954,-46.163 ; -169.132,-46.237 ccw(c-169.133,-45.983) -168.954,-46.163 ; -169.132,-46.237 ccw(c-169.133,-45.983) -168.954,-46.163 ; -168.954,-46.163 v1(-167.377,-44.586) ; -168.954,-46.163 v1(-167.377,-44.586) ; -168.954,-46.163 v1(-167.377,-44.586)